# Allegro board AI_NAS_DB__A2_PCB.brd
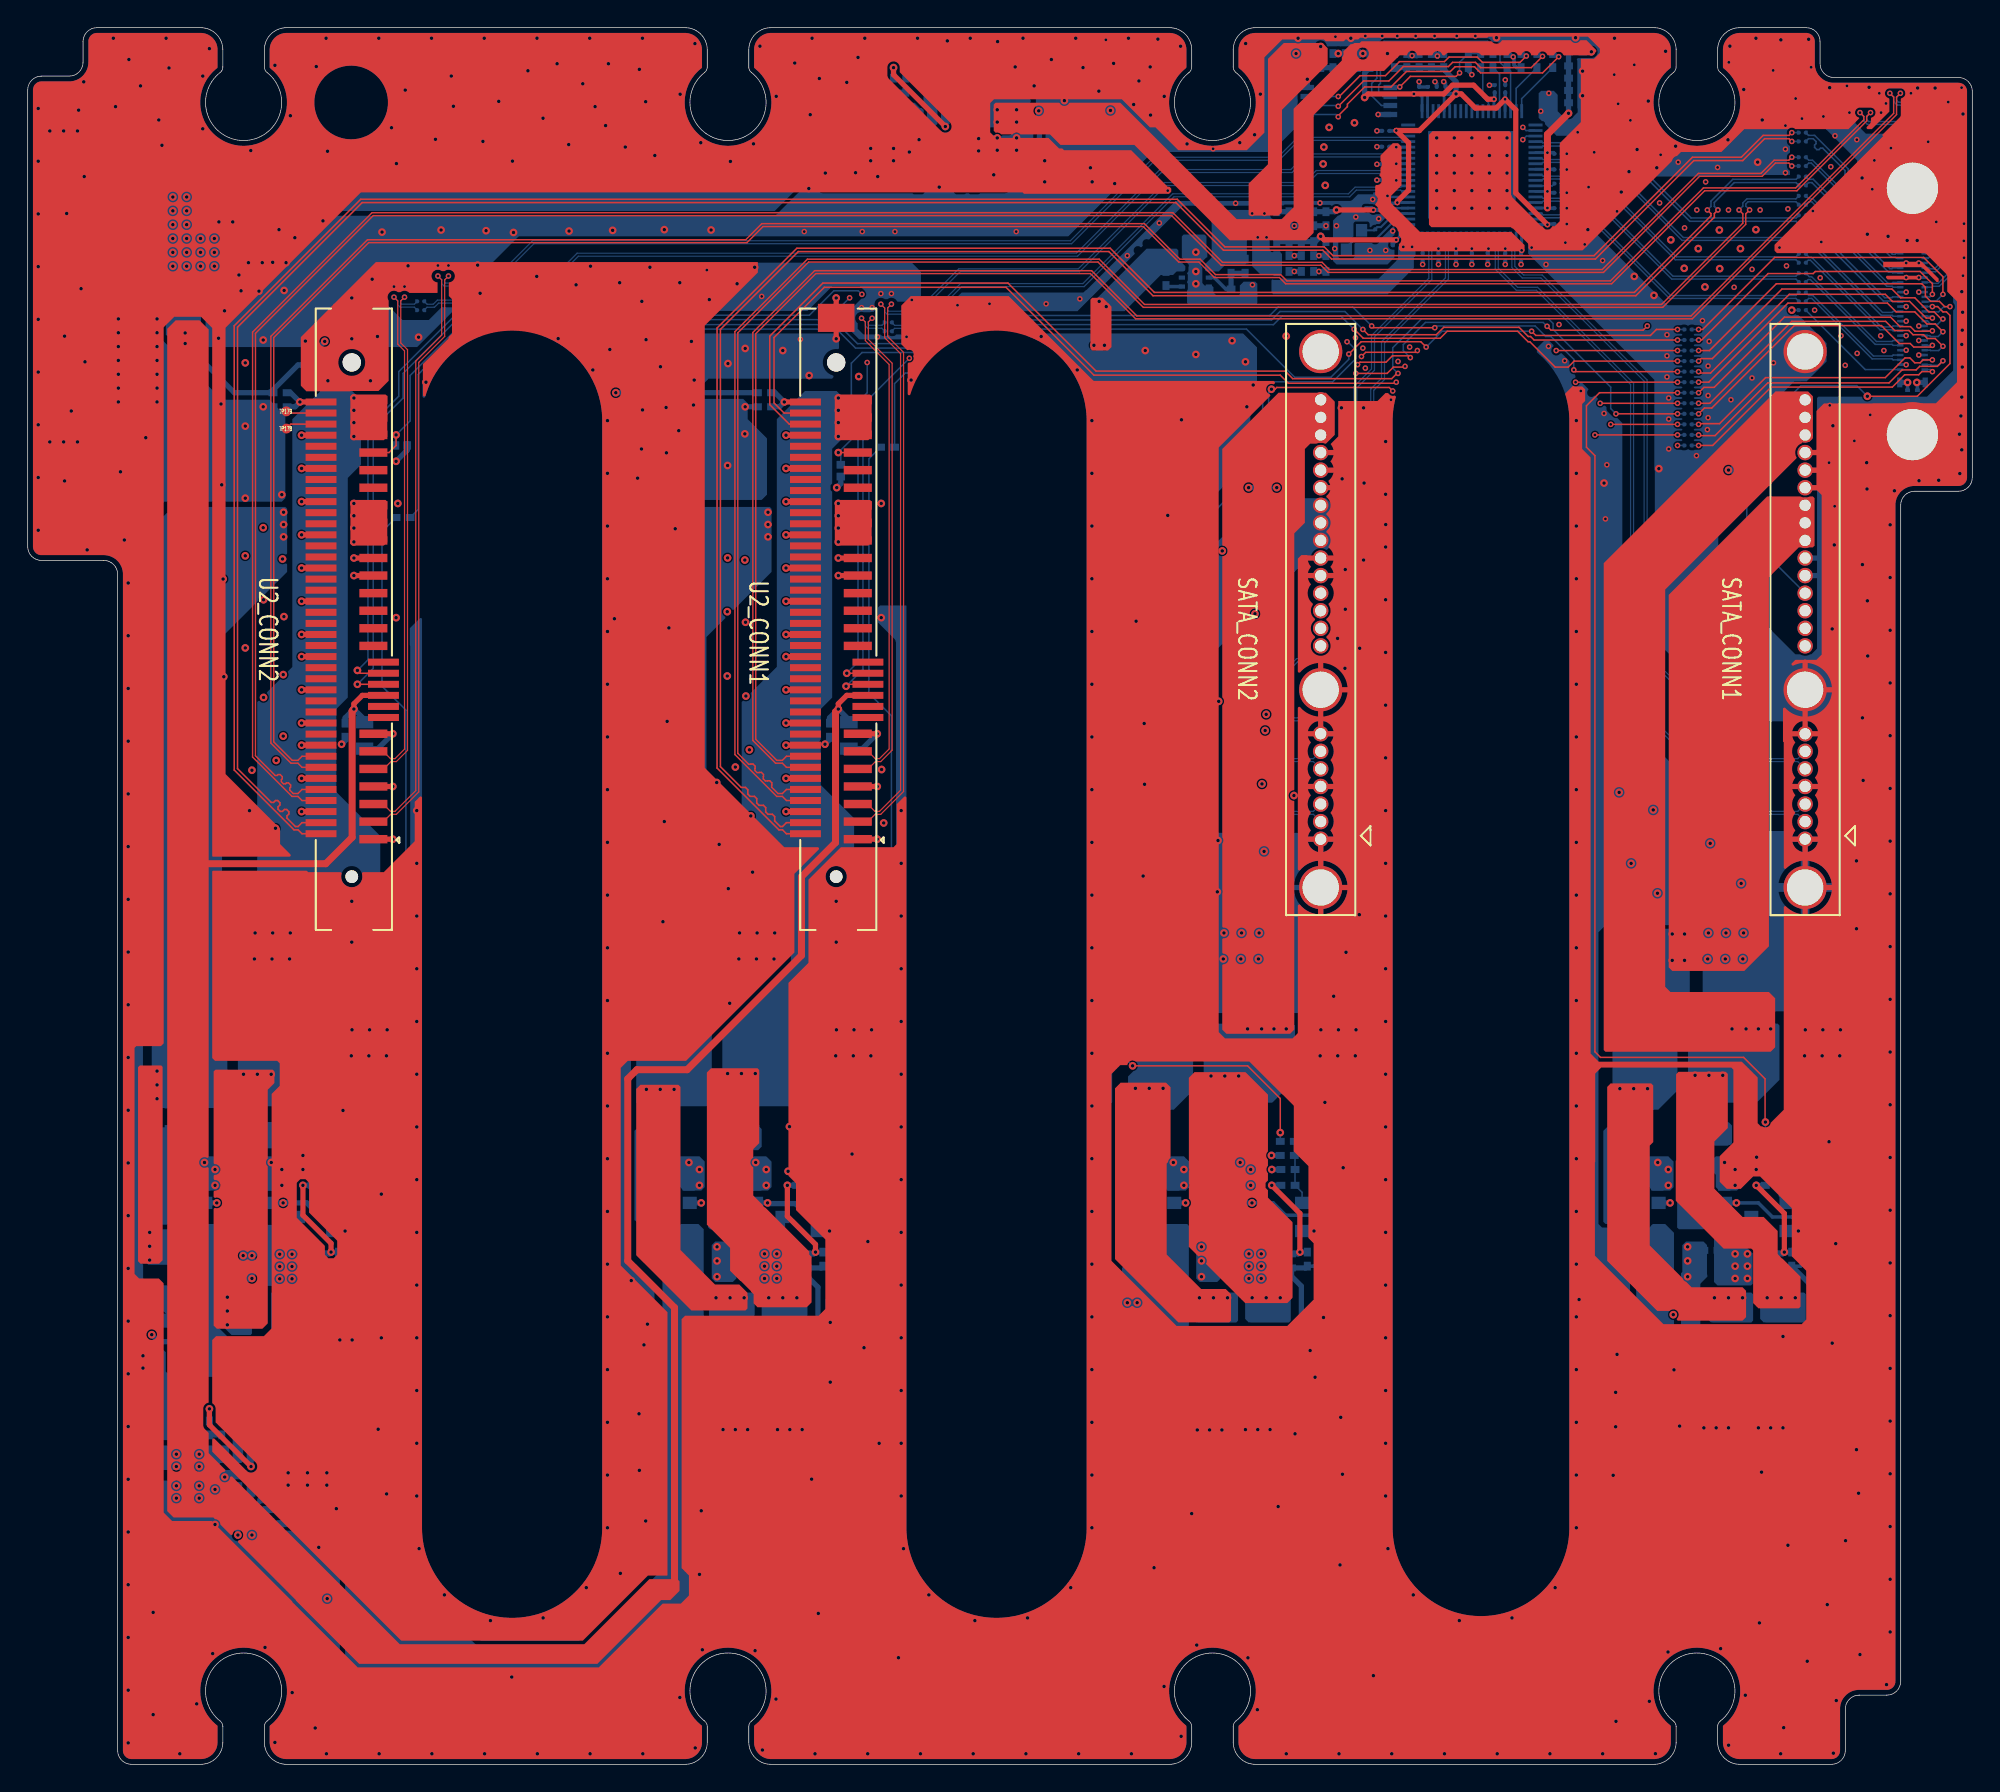
[diagram p0: board, top side]
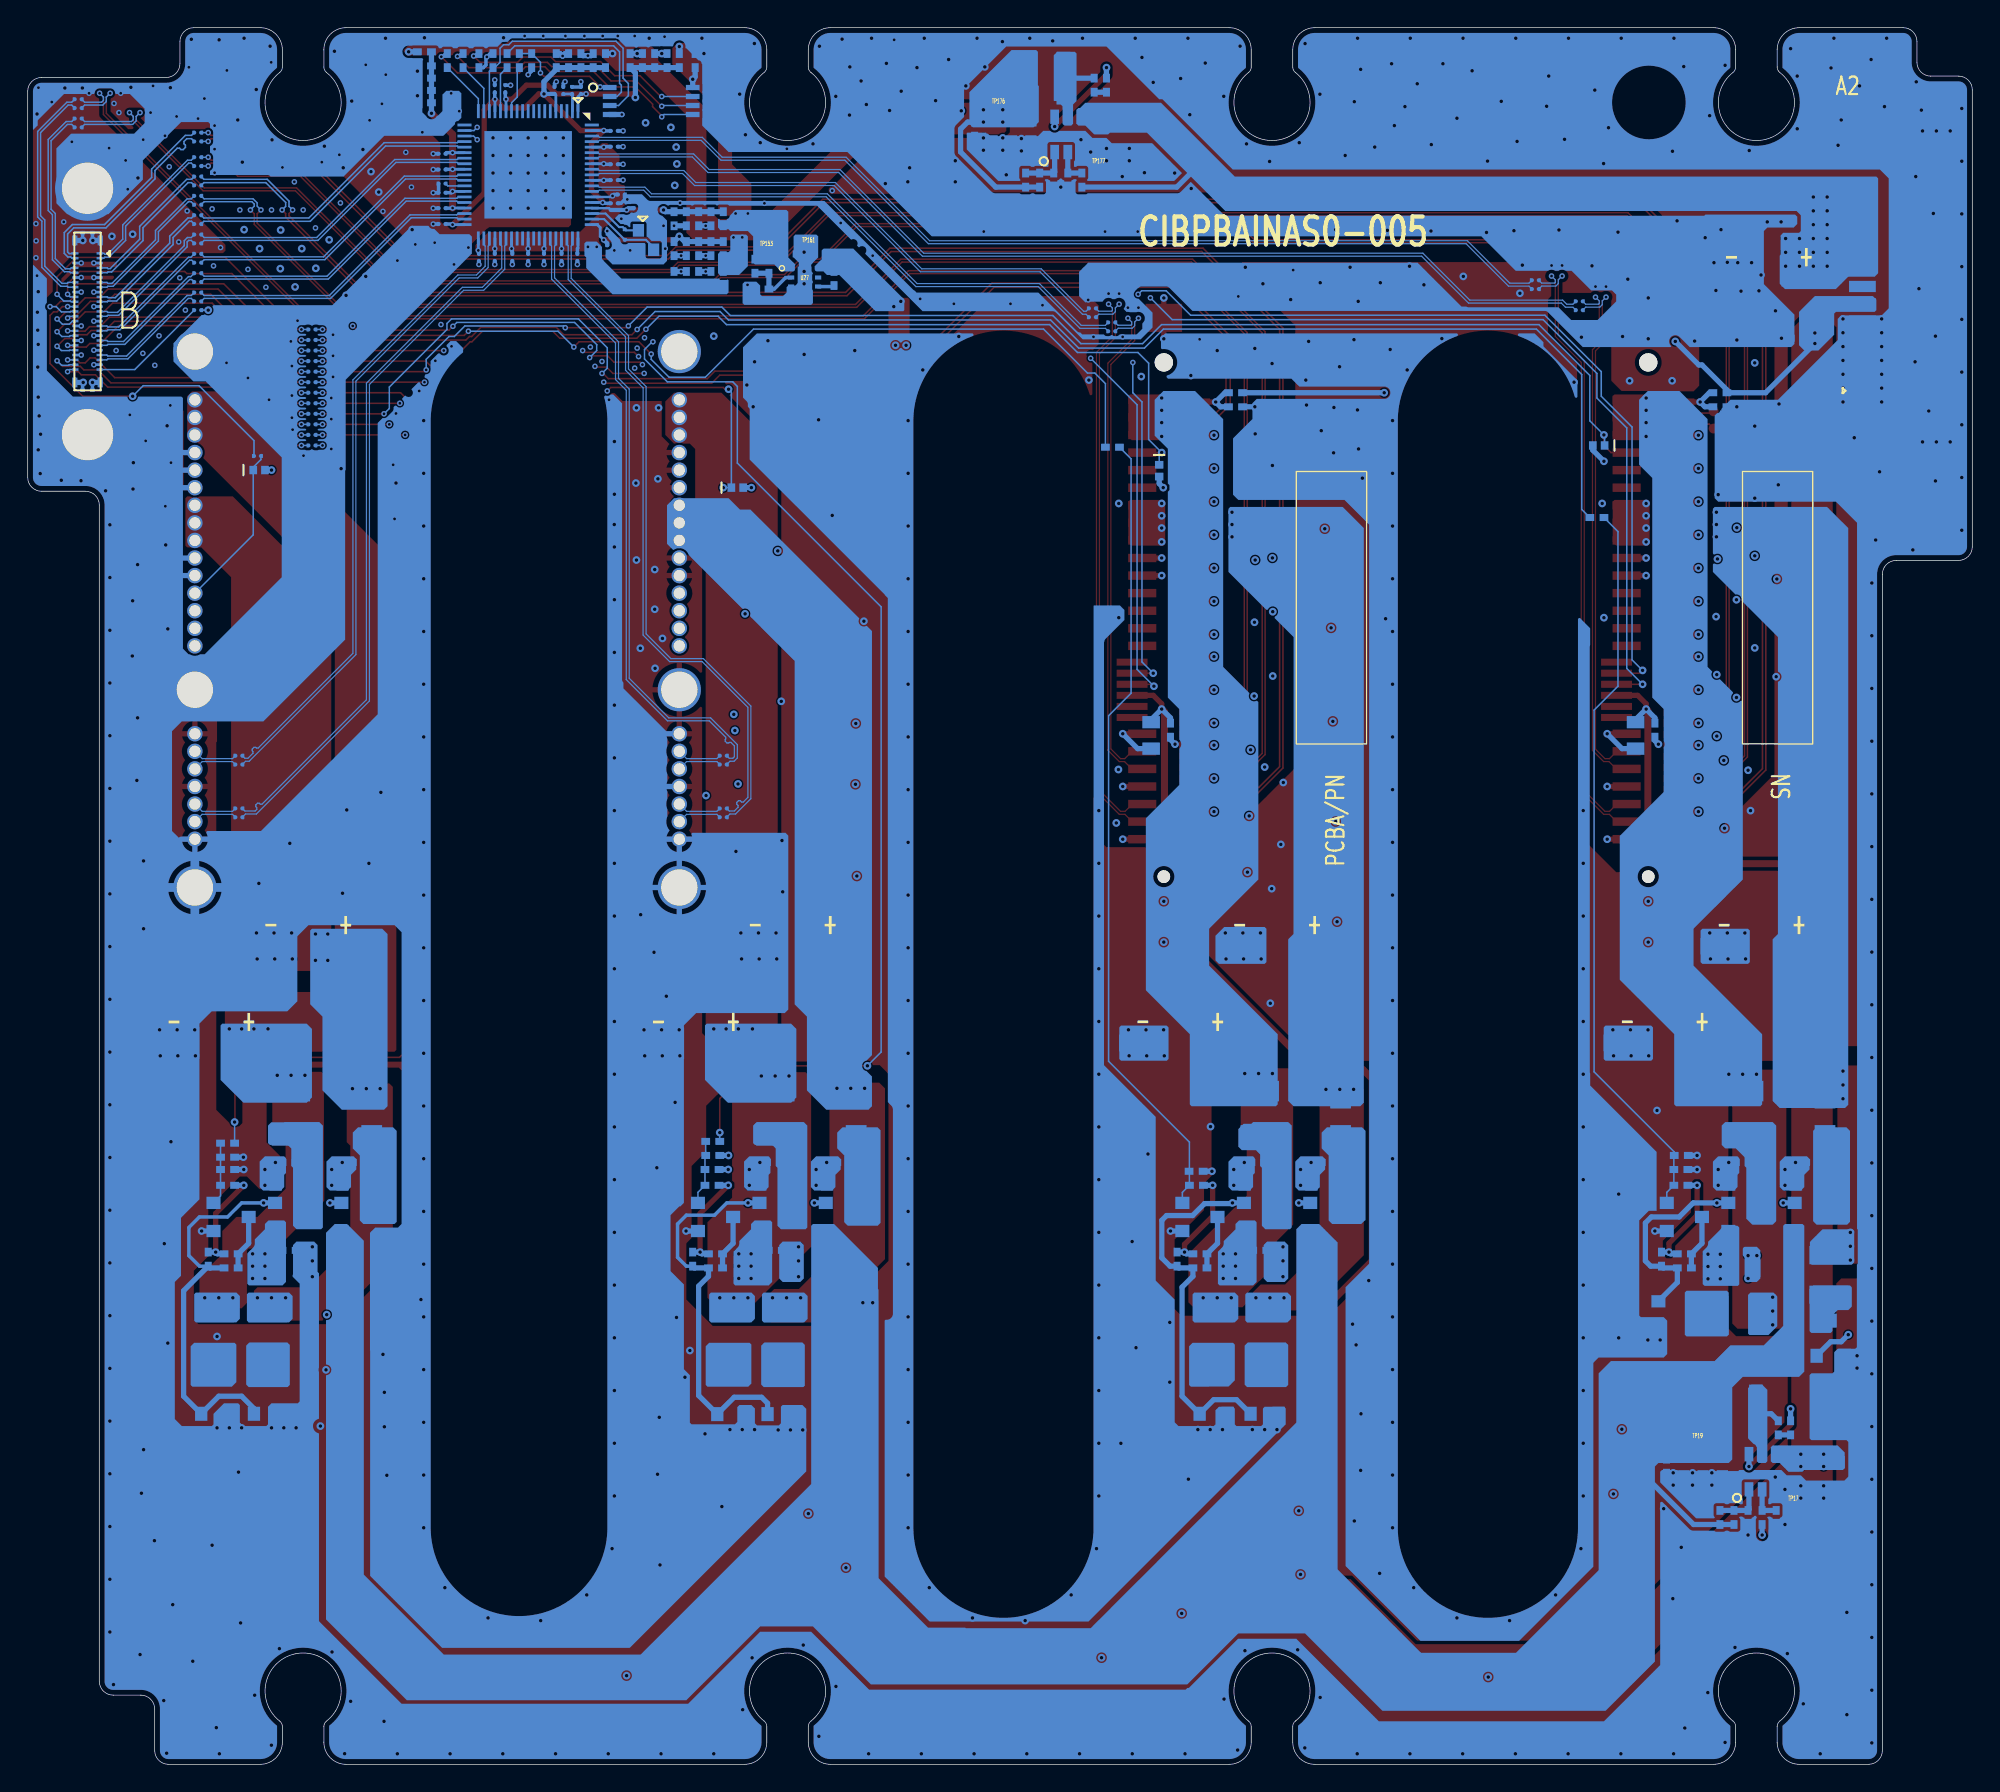
[diagram p1: board, bottom side, seen from below]

Outline 140.5 x 125.5 mm; copper layers: TOP, GND02, PWR03, BOTTOM. Coordinates in mm from the lower left corner of the outline.
Outline path: 0,121 arc(0.29,121.71) 1,122 3,122 arc(3.71,122.29) 4,123 4,124.5 arc(4.29,125.21) 5,125.5 12.5,125.5 arc(13.63,125.03) 14.1,123.9 14.1,122.66 arc(14.05,122.44) 13.91,122.26 arc(15.6,117.34) 17.29,122.26 arc(17.15,122.44) 17.1,122.66 17.1,123.9 arc(17.57,125.03) 18.7,125.5 47.5,125.5 arc(48.63,125.03) 49.1,123.9 49.1,122.66 arc(49.05,122.44) 48.91,122.26 arc(50.6,117.34) 52.29,122.26 arc(52.15,122.44) 52.1,122.66 52.1,123.9 arc(52.57,125.03) 53.7,125.5 82.5,125.5 arc(83.63,125.03) 84.1,123.9 84.1,122.66 arc(84.05,122.44) 83.91,122.26 arc(85.6,117.34) 87.29,122.26 arc(87.15,122.44) 87.1,122.66 87.1,123.9 arc(87.57,125.03) 88.7,125.5 117.5,125.5 arc(118.63,125.03) 119.1,123.9 119.1,122.66 arc(119.05,122.44) 118.91,122.26 arc(120.6,117.34) 122.29,122.26 arc(122.15,122.44) 122.1,122.66 122.1,123.9 arc(122.57,125.03) 123.7,125.5 128.5,125.5 arc(129.21,125.21) 129.5,124.5 129.5,122.9 arc(129.79,122.19) 130.5,121.9 139.5,121.9 arc(140.21,121.61) 140.5,120.9 140.5,93 arc(140.21,92.29) 139.5,92 136.33,92 arc(135.62,91.71) 135.33,91 135.33,6 arc(135.03,5.29) 134.33,5 132.33,5 arc(131.62,4.71) 131.33,4 131.33,1 arc(131.03,0.29) 130.33,0 123.7,0 arc(122.57,0.47) 122.1,1.6 122.1,2.73 arc(122.15,2.95) 122.29,3.13 arc(120.6,8.05) 118.91,3.13 arc(119.05,2.95) 119.1,2.73 119.1,1.6 arc(118.63,0.47) 117.5,0 88.7,0 arc(87.57,0.47) 87.1,1.6 87.1,2.73 arc(87.15,2.95) 87.29,3.13 arc(85.6,8.05) 83.91,3.13 arc(84.05,2.95) 84.1,2.73 84.1,1.6 arc(83.63,0.47) 82.5,0 53.7,0 arc(52.57,0.47) 52.1,1.6 52.1,2.73 arc(52.15,2.95) 52.29,3.13 arc(50.6,8.05) 48.91,3.13 arc(49.05,2.95) 49.1,2.73 49.1,1.6 arc(48.63,0.47) 47.5,0 18.7,0 arc(17.57,0.47) 17.1,1.6 17.1,2.73 arc(17.15,2.95) 17.29,3.13 arc(15.6,8.05) 13.91,3.13 arc(14.05,2.95) 14.1,2.73 14.1,1.6 arc(13.63,0.47) 12.5,0 7.5,0 arc(6.79,0.29) 6.5,1 6.5,86 arc(6.21,86.71) 5.5,87 1,87 arc(0.29,87.29) 0,88 0,121

## Design rules (mm)
constraint set DEFAULT: min track width 0.112
net group DPE_CLKN1: nets DPE_CLKN1 N32455776
net group DPE_CLKN2: nets DPE_CLKN2 N32589847
net group DPE_CLKN3: nets DPE_CLKN3 N32664505
net group DPE_CLKP1: nets DPE_CLKP1 N32455769
net group DPE_CLKP2: nets DPE_CLKP2 N32589789
net group DPE_CLKP3: nets DPE_CLKP3 N32664525
net group DPE_RXN2: nets DPE_RXN2 N32455880
net group DPE_RXN3: nets DPE_RXN3 N32590057
net group DPE_RXN8: nets DPE_RXN8 N32665204
net group DPE_RXN9: nets DPE_RXN9 N32665409
net group DPE_RXP2: nets DPE_RXP2 N32455887
net group DPE_RXP3: nets DPE_RXP3 N32590086
net group DPE_RXP8: nets DPE_RXP8 N32665224
net group DPE_RXP9: nets DPE_RXP9 N32665457
net group DPE_TXN2: nets DPE_TXN2 N32455855
net group DPE_TXN3: nets DPE_TXN3 N32590006
net group DPE_TXN8: nets DPE_TXN8 N32665094
net group DPE_TXN9: nets DPE_TXN9 N32665319
net group DPE_TXP2: nets DPE_TXP2 N32455848
net group DPE_TXP3: nets DPE_TXP3 N32589961
net group DPE_TXP8: nets DPE_TXP8 N32665139
net group DPE_TXP9: nets DPE_TXP9 N32665364
net group OFF_CTRL1: nets N32731773 OFF_CTRL1
net group OFF_CTRL2: nets N32732099 OFF_CTRL2
net group SATA1_RXM: nets N32547936 SATA1_RXM
net group SATA1_RXP: nets N32547940 SATA1_RXP
net group SATA1_TXM: nets N32547896 SATA1_TXM
net group SATA1_TXP: nets N32547892 SATA1_TXP
net group SATA2_RXM: nets N32548181 SATA2_RXM
net group SATA2_RXP: nets N32548185 SATA2_RXP
net group SATA2_TXM: nets N32548141 SATA2_TXM
net group SATA2_TXP: nets N32548137 SATA2_TXP
net group SATA3_RXM: nets N32444973 SATA3_RXM
net group SATA3_RXP: nets N32693265 SATA3_RXP
net group SATA3_TXM: nets N32444933 SATA3_TXM
net group SATA3_TXP: nets N32444929 SATA3_TXP
net group SATA4_RXM: nets N32590084 SATA4_RXM
net group SATA4_RXP: nets N32693602 SATA4_RXP
net group SATA4_TXM: nets N32590026 SATA4_TXM
net group SATA4_TXP: nets N32590004 SATA4_TXP
net group VCCO33: nets N32595209 VCCO33
net group POWER: nets GND

## Placement (name value [footprint] x y rotation side)
C3  0.22uF  [C0201]  128.22 109.15 0 bottom
C4  0.22uF  [C0201]  128.22 108.52 0 bottom
C7  0.22uF  [C0201]  128.22 105.72 0 bottom
C8  0.22uF  [C0201]  128.22 106.36 0 bottom
C17  270uF  [CAP-SMD-D6_3]  14.7 107.39 0 bottom
C18  0.1uF  [C0402]  12.52 111.57 0 bottom
C19  0.1uF  [C0402]  12.65 103.06 0 bottom
C20  12pF  [C0201]  97.36 111.18 90 bottom
C21  12pF  [C0201]  97.36 109.91 270 bottom
C22  1uF  [C0201]  101.17 120.96 90 bottom
C23  10nF  [C0201]  125.24 69.08 180 bottom
C24  10nF  [C0201]  125.24 72.25 180 bottom
C25  0.1uF  [C0402]  121.61 37.14 180 bottom
C26  1uF  [C0402]  127.45 36.51 270 bottom
C27  0.1uF  [C0402]  121.61 43.49 0 bottom
C28  10nF  [C0201]  125.24 68.44 180 bottom
C29  10nF  [C0201]  125.24 72.89 180 bottom
C30  22uF  [C0805]  121.61 35.87 180 bottom
C31  22uF  [C0805]  121.61 42.1 0 bottom
C32  22uF  [C0805]  116.79 42.1 180 bottom
C33  0.1uF  [C0402]  116.53 43.49 180 bottom
C34  220uF  [CAP-SMD-D6_3]  120.23 59.13 0 bottom
C35  270uF  [CAP-SMD-D6_3]  127.23 52.13 0 bottom
C36  22uF  [C0805]  86.49 35.87 180 bottom
C37  1uF  [C0402]  92.45 36.51 270 bottom
C38  10nF  [C0201]  90.24 69.08 180 bottom
C39  0.1uF  [C0402]  86.49 37.14 180 bottom
C40  22uF  [C0805]  86.61 42.1 0 bottom
C41  10nF  [C0201]  90.24 68.44 180 bottom
C42  0.1uF  [C0402]  86.61 43.49 0 bottom
C43  10nF  [C0201]  90.24 72.25 180 bottom
C44  10nF  [C0201]  90.24 72.89 180 bottom
C45  22uF  [C0805]  81.79 42.1 180 bottom
C46  0.1uF  [C0402]  81.53 43.49 180 bottom
C47  220uF  [CAP-SMD-D6_3]  85.22 59.13 0 bottom
C48  270uF  [CAP-SMD-D6_3]  92.22 52.13 0 bottom
C49  22uF  [C0805]  16.71 35.85 180 bottom
C50  0.1uF  [C0402]  16.71 37.12 180 bottom
C51  1uF  [C0402]  22.45 36.51 270 bottom
C52  22uF  [C0805]  16.61 42.1 0 bottom
C53  0.1uF  [C0402]  16.61 43.49 0 bottom
C54  0.22uF  [C0201]  128.22 116.14 0 bottom
C55  10nF  [C0201]  31.57 107.25 0 bottom
C56  10nF  [C0201]  31.57 106.61 0 bottom
C57  10nF  [C0201]  28.39 105.09 0 bottom
C58  22uF  [C0805]  11.79 42.1 180 bottom
C59  0.1uF  [C0402]  11.53 43.49 180 bottom
C60  0.22uF  [C0201]  128.22 115.5 0 bottom
C61  10nF  [C0201]  28.39 105.72 0 bottom
C62  22uF  [C0805]  24.33 74.35 270 bottom
C63  0.1uF  [C0402]  22.93 74.74 270 bottom
C64  220uF  [CAP-SMD-D6_3]  15.23 59.13 0 bottom
C65  270uF  [CAP-SMD-D6_3]  22.23 52.13 0 bottom
C66  0.1uF  [C0402]  51.49 37.14 180 bottom
C67  22uF  [C0805]  51.61 42.1 0 bottom
C68  0.1uF  [C0402]  51.61 43.49 0 bottom
C69  10nF  [C0201]  63.57 105.22 0 bottom
C70  10nF  [C0201]  63.57 104.58 0 bottom
C71  22uF  [C0805]  51.49 35.87 180 bottom
C72  1uF  [C0402]  57.45 36.51 270 bottom
C73  0.22uF  [C0201]  128.22 113.34 0 bottom
C74  0.22uF  [C0201]  128.22 112.71 0 bottom
C75  10nF  [C0201]  62.18 104.2 0 bottom
C76  10nF  [C0201]  62.18 103.56 0 bottom
C77  22uF  [C0805]  46.79 42.1 180 bottom
C78  0.1uF  [C0402]  46.53 43.49 180 bottom
C79  22uF  [C0805]  59.33 74.35 270 bottom
C80  0.1uF  [C0402]  57.93 74.74 270 bottom
C81  220uF  [CAP-SMD-D6_3]  50.22 59.13 0 bottom
C82  270uF  [CAP-SMD-D6_3]  57.22 52.13 0 bottom
C1577  4.7uF  [C0402]  83.26 109.15 0 bottom
C1578  4.7uF  [C0402]  85.42 109.15 180 bottom
C1579  1nF  [C0402]  87.96 108.26 90 bottom
C1676  0.1uF  [C0402]  92.28 123.12 90 bottom
C2125  22uF  [C0805]  60.02 117.53 270 bottom
C2126  22uF  [C0805]  61.67 117.53 270 bottom
C2127  0.1uF  [C0402]  63.07 117.66 270 bottom
C2128  0.1uF  [C0402]  63.45 121.34 270 bottom
C2129  220pF  [C0402]  68.4 114.49 270 bottom
C2130  22uF  [C0603]  68.02 118.04 270 bottom
C2131  22uF  [C0603]  70.81 118.04 270 bottom
C2132  22uF  [C0603]  69.42 118.04 270 bottom
C2133  0.1uF  [C0402]  72.08 118.17 270 bottom
C2134  0.1uF  [C0201]  98.12 118.04 180 bottom
C2135  0.1uF  [C0201]  106.75 121.09 90 bottom
C2136  0.1uF  [C0201]  110.56 111.31 0 bottom
C2137  0.1uF  [C0201]  98.12 112.81 180 bottom
C2138  0.1uF  [C0201]  102.44 120.96 90 bottom
C2139  0.1uF  [C0201]  110.56 112.45 0 bottom
C2140  0.1uF  [C0201]  110.56 115.25 0 bottom
C2141  0.1uF  [C0201]  110.56 116.39 0 bottom
C2142  0.1uF  [C0201]  110.56 113.57 0 bottom
C2143  0.1uF  [C0201]  100.53 120.96 90 bottom
C2144  0.1uF  [C0201]  105.99 121.09 90 bottom
C2145  0.1uF  [C0201]  96.72 112.2 270 bottom
C2146  0.1uF  [C0201]  97.61 113.44 180 bottom
C2147  0.1uF  [C0201]  107.9 108.9 270 bottom
C2148  0.1uF  [C0201]  106.75 108.9 270 bottom
C2149  0.1uF  [C0201]  104.34 108.9 270 bottom
C2150  0.1uF  [C0201]  105.48 108.9 270 bottom
C2151  0.1uF  [C0201]  103.2 108.9 270 bottom
C2152  0.1uF  [C0201]  101.93 108.9 270 bottom
C2153  0.1uF  [C0201]  98.12 115.63 180 bottom
C2154  0.1uF  [C0201]  98.12 114.49 180 bottom
C2155  0.1uF  [C0201]  98.12 116.9 180 bottom
C2156  0.1uF  [C0201]  98.37 109.79 180 bottom
C2157  220pF  [C0402]  18.23 17.84 270 bottom
C2158  22uF  [C0805]  9.85 20.89 270 bottom
C2159  22uF  [C0805]  11.5 20.89 270 bottom
C2160  0.1uF  [C0402]  12.9 21.01 270 bottom
C2161  0.1uF  [C0402]  14.02 24.32 270 bottom
C2163  22uF  [C0603]  20.85 21.57 270 bottom
C2164  22uF  [C0603]  19.45 21.57 270 bottom
C2165  22uF  [C0603]  18.06 21.57 270 bottom
C2166  0.1uF  [C0402]  22.1 21.55 270 bottom
C2171  10nF  [C0402]  99.64 123.12 90 bottom
C2172  1nF  [C0402]  101.42 123.12 90 bottom
C2173  100pF  [C0402]  100.53 123.12 90 bottom
C2174  10pF  [C0402]  102.31 123.12 90 bottom
C2175  10nF  [C0402]  111.83 122.74 0 bottom
C2176  1nF  [C0402]  111.83 120.96 0 bottom
C2177  100pF  [C0402]  111.83 121.85 0 bottom
C2178  10pF  [C0402]  111.83 120.07 0 bottom
C2179  10nF  [C0402]  91.13 107.37 90 bottom
C2180  1nF  [C0402]  92.91 107.37 90 bottom
C2181  100pF  [C0402]  92.02 107.37 90 bottom
C2182  10pF  [C0402]  93.8 107.37 90 bottom
C2183  10nF  [C0402]  91.13 109.53 270 bottom
C2184  1nF  [C0402]  92.91 109.53 270 bottom
C2185  100pF  [C0402]  92.02 109.53 270 bottom
C2186  10pF  [C0402]  93.8 109.53 270 bottom
C2187  10nF  [C0402]  94.31 123.12 90 bottom
C2188  1nF  [C0402]  96.09 123.12 90 bottom
C2189  100pF  [C0402]  95.2 123.12 90 bottom
C2190  10pF  [C0402]  96.97 123.12 90 bottom
C2191  10nF  [C0402]  91.13 111.69 270 bottom
C2192  1nF  [C0402]  92.91 111.69 270 bottom
C2193  100pF  [C0402]  92.02 111.69 270 bottom
C2194  10pF  [C0402]  93.8 111.69 270 bottom
C2195  0.1uF  [C0402]  126.06 43.87 180 bottom
C2196  0.1uF  [C0402]  91.01 44 180 bottom
C2197  0.1uF  [C0402]  21.03 44 180 bottom
C2198  0.1uF  [C0402]  56.08 42.86 180 bottom
D1  ESD5451N  [DFN1006-2]  123.77 93.53 180 bottom
D2  ESD5451N  [DFN1006-2]  89.23 92.26 180 bottom
D4  ESD5451N  [DFN1006-2]  27 95.31 0 bottom
D6  ESD5451N  [DFN1006-2]  58.75 93.48 270 bottom
F1  BSMD0805-125-6V  [F0805]  115.64 46.8 90 bottom
F2  BSMD1210-200-16V  [F1210]  121.49 47.05 90 bottom
F3  BSMD0805-125-6V  [F0805]  80.64 46.8 90 bottom
F4  BSMD1210-200-16V  [F1210]  86.49 47.05 90 bottom
F5  BSMD0805-125-6V  [F0805]  10.64 46.8 90 bottom
F6  BSMD1210-200-16V  [F1210]  16.49 47.05 90 bottom
F7  BSMD0805-125-6V  [F0805]  45.64 46.8 90 bottom
F8  BSMD1210-200-16V  [F1210]  51.49 47.05 90 bottom
FB1  120R@100MHz  [R0402]  98.75 123.12 270 bottom
FB2  120R@100MHz  [R0402]  111.83 123.76 180 bottom
FB3  120R@100MHz  [R0402]  90.24 107.37 270 bottom
FB4  120R@100MHz  [R0402]  90.24 109.53 90 bottom
FB5  120R@100MHz  [R0402]  93.42 123.12 270 bottom
FB6  120R@100MHz  [R0402]  90.24 111.69 90 bottom
H1  LLZN-NUT-0200  [HOLE_C3R00_C5R00]  136.17 113.9 180 bottom
H2  LLZN-NUT-0200  [HOLE_C3R00_C5R00]  136.17 96.1 180 bottom
J1  OK-118RF050/2-35  [CON50-0P35-OK-118RF]  136.07 105.03 270 bottom
J2  WF13-131G1R  [CON13-1P25-21P4X6P7]  7.95 105.34 90 bottom
J3  LYDSA-L5ZLC985M-221N  [SATA30_22P_V_DIP]  128.42 98.61 270 top
J4  LYDSA-L5ZLC985M-221N  [SATA30_22P_V_DIP]  93.42 98.61 270 top
J5  LYDSF-8639430-683N  [SSF-8639-4030683N]  24.98 82.73 270 top
J6  LYDSF-8639430-683N  [SSF-8639-4030683N]  59.97 82.73 270 top
L5  3.3uH  [L414120]  16.84 25.54 0 bottom
L36  1.5uH  [L414120]  66.88 121.85 0 bottom
NOREF  -  []  -72.75 -61.59 0 top
NOREF#2  -  []  7.5 0 90 top
NOREF#3  -  []  35.13 36.25 0 top
NOREF#4  -  []  63.89 217.33 0 top
NOREF#5  -  []  104.85 45.91 0 top
NOREF#6  -  []  235.07 103.77 0 top
NOREF#7  -  []  70.18 41.59 0 top
NOREF#8  -  []  0 121 0 top
NOREF#9  -  []  23.72 119.77 0 top
NOREF#10  -  []  220.6 183.4 0 top
NOREF#11  -  []  64.08 164.97 0 top
Q1  CJ3401  [SOT23]  121.36 39.56 90 bottom
Q3  MMBT3904  [SOT23]  125.8 39.56 90 bottom
Q4  CJ3401  [SOT23]  116.57 39.56 90 bottom
Q5  CJ3401  [SOT23]  86.36 39.56 90 bottom
Q7  MMBT3904  [SOT23]  90.8 39.56 90 bottom
Q8  CJ3401  [SOT23]  81.57 39.56 90 bottom
Q11  CJ3401  [SOT23]  16.36 39.56 90 bottom
Q12  MMBT3904  [SOT23]  20.8 39.56 90 bottom
Q13  CJ3401  [SOT23]  11.57 39.56 90 bottom
Q17  CJ3401  [SOT23]  51.36 39.56 90 bottom
Q19  MMBT3904  [SOT23]  55.8 39.56 90 bottom
Q20  CJ3401  [SOT23]  46.57 39.56 90 bottom
Q21  CJ2310  [SOT-23]  127.96 25.33 0 bottom
Q22  CJ2310  [SOT-23]  124.15 25.33 0 bottom
Q23  CJ2310  [SOT-23]  90.68 25.31 0 bottom
Q24  CJ2310  [SOT-23]  87.04 25.31 0 bottom
Q25  CJ2310  [SOT-23]  22.68 33.46 90 bottom
Q26  CJ2310  [SOT-23]  11.25 29.52 0 bottom
Q27  CJ2310  [SOT-23]  55.83 25.33 0 bottom
Q28  CJ2310  [SOT-23]  52.14 25.33 0 bottom
R1  0R  [R0201]  128.22 111.31 180 bottom
R2  0R  [R0201]  128.22 111.95 180 bottom
R3  0R  [R0201]  119.96 99.12 0 bottom
R4  0R  [R0201]  119.96 99.88 0 bottom
R5  0R  [R0201]  119.96 97.6 0 bottom
R6  0R  [R0201]  119.96 98.36 0 bottom
R7  0R  [R0201]  119.96 102.93 0 bottom
R8  0R  [R0201]  119.96 103.69 0 bottom
R9  0R  [R0201]  123.9 94.55 0 bottom
R10  0R  [R0201]  119.96 96.83 0 bottom
R11  0R  [R0201]  119.96 102.17 0 bottom
R12  0R  [R0201]  119.96 96.07 0 bottom
R13  0R  [R0201]  119.96 100.64 0 bottom
R14  0R  [R0201]  119.96 95.31 0 bottom
R15  0R  [R0201]  119.96 101.41 0 bottom
R16  0R  [R0201]  128.22 105.09 180 bottom
R17  0R  [R0201]  128.22 117.92 0 bottom
R19  0R  [R0201]  128.22 117.28 0 bottom
R21  12K  [R0201]  100.78 108.9 270 bottom
R22  12K  [R0201]  110.56 114.23 0 bottom
R23  4.7K  [R0201]  101.8 120.96 270 bottom
R24  100K  [R0402]  126.06 41.84 0 bottom
R25  100K  [R0402]  125.8 36.89 180 bottom
R26  820K  [R0402]  125.8 35.87 0 bottom
R29  100K  [R0402]  126.06 42.99 0 bottom
R30  100K  [R0402]  91.06 41.84 0 bottom
R31  820K  [R0402]  90.8 35.87 0 bottom
R32  100K  [R0402]  90.8 36.89 180 bottom
R35  100K  [R0402]  91.06 42.99 0 bottom
R40  100K  [R0402]  21.06 41.84 0 bottom
R41  100K  [R0402]  20.8 36.89 180 bottom
R42  820K  [R0402]  20.8 35.87 0 bottom
R43  100K  [R0402]  21.06 42.99 0 bottom
R44  1K  [R0402]  27.12 90.1 180 bottom
R49  4.7K  [R0402]  18.23 99.12 180 bottom
R50  0R  [R0402]  18.23 98.1 180 bottom
R51  100K  [R0402]  56.06 41.84 0 bottom
R52  100K  [R0402]  55.8 36.89 180 bottom
R53  820K  [R0402]  55.8 35.87 0 bottom
R55  1K  [R0402]  62.12 95.18 180 bottom
R57  4.7K  [R0402]  53.23 99.12 180 bottom
R58  0R  [R0402]  53.23 98.1 180 bottom
R68  1K  [R0402]  91.01 45.02 0 bottom
R69  1K  [R0402]  126.06 44.89 0 bottom
R83  13.3K  [R0402]  16.2 17.84 270 bottom
R87  100K  [R0402]  17.22 17.84 270 bottom
R201  20K  [R0402]  87.45 106.61 0 bottom
R2385  100K  [R0402]  82.24 107.37 270 bottom
R2386  100K  [R0402]  86.94 108.26 90 bottom
R2468  10K  [R0402]  107.9 123.12 90 bottom
R2469  10K  [R0402]  106.88 123.12 270 bottom
R2470  10K  [R0402]  104.09 123.12 90 bottom
R2471  0R  [R0402]  104.98 123.12 270 bottom
R2473  0R  [R0402]  109.04 123.12 270 bottom
R2476  0R  [R0402]  105.86 123.12 270 bottom
R2593  0R  [R0402]  13.13 24.32 270 bottom
R2692  0R  [R0402]  110.18 123.12 270 bottom
R2859  100K  [R0402]  64.34 114.49 90 bottom
R2860  100K  [R0402]  67.38 114.49 270 bottom
R2861  0R  [R0402]  62.56 121.34 270 bottom
R2862  20K  [R0402]  65.35 114.49 270 bottom
R2863  91K  [R0402]  66.37 114.49 270 bottom
R2925  100K  [R0402]  15.19 17.84 90 bottom
R2926  100K  [R0402]  14.17 17.84 270 bottom
R2929  0R  [R0201]  128.22 114.74 0 bottom
R2930  0R  [R0201]  128.22 114.11 0 bottom
R2931  0R  [R0201]  136.85 118.3 0 bottom
R2932  0R  [R0201]  136.85 118.93 0 bottom
R2933  0R  [R0201]  136.85 119.69 0 bottom
R2934  0R  [R0201]  136.85 120.33 0 bottom
R2935  0R  [R0201]  128.22 110.55 180 bottom
R2936  0R  [R0201]  128.22 109.91 180 bottom
R2937  0R  [R0201]  128.22 107.76 180 bottom
R2938  0R  [R0201]  128.22 107.12 180 bottom
R2940  300R  [R1210]  126.95 31.17 270 bottom
R2941  300R  [R1210]  123.14 31.17 270 bottom
R2942  300R  [R1210]  89.74 31.17 270 bottom
R2943  300R  [R1210]  85.93 31.17 270 bottom
R2944  300R  [R1210]  16.84 32.44 0 bottom
R2945  300R  [R1210]  10.36 35.37 270 bottom
R2946  300R  [R1210]  54.81 31.17 270 bottom
R2947  300R  [R1210]  51 31.17 270 bottom
TP17  TP_0p7mm  [TP_0_7MM]  12.9 19.24 180 bottom
TP19  TP_0p7mm  [TP_0_7MM]  19.81 23.76 0 bottom
TP153  TP_0p7mm  [TP_0_7MM]  87.07 109.91 180 bottom
TP161  TP_0p7mm  [TP_0_7MM]  84.02 110.17 180 bottom
TP176  TP_0p7mm  [TP_0_7MM]  70.3 120.2 0 bottom
TP177  TP_0p7mm  [TP_0_7MM]  63.07 115.88 180 bottom
TP178  TP_0p7mm  [TP_0_7MM]  18.69 96.53 0 top
TP179  TP_0p7mm  [TP_0_7MM]  18.69 97.77 0 top
U1  JMB585  [QFN76-0P4-9X9]  104.34 114.87 270 bottom
U8  SY8156IADC  [TSOT23-6]  15.19 21.14 180 bottom
U27  TLV75901PDRVR  [WSON6-0P65-2X2]  84.37 107.44 180 bottom
U75  P25Q40SH-TSH-IR  [TSSOP8-0P65-3X6P4]  95.45 120.2 270 bottom
U98  SY8156IADC  [TSOT23-6]  65.35 117.79 180 bottom
Y1  25MHz  [SMD2016-4P]  95.83 110.17 270 bottom

## Library data of the parts
C3 C4 C7 C8 C54 C60 C73 C74 = General_CAP: signal model: GENERAL_CAP_C0201_0.22UF_0.22uF
C17 C34 C35 C48 C64 C65 C81 C82 = General_CAP_POL
C18 C19 C25-C27 C33 C37 C39 C42 C46 C50 C51 C53 C59 C63 C66 C68 C72 C78 C80 C1577-C1579 C1676 C2127-C2129 C2133 C2157 C2160 C2161 C2166 C2171-C2198 = General_CAP: Tolerance: #TOL; User Part Number: HAMP
C20-C22 C30-C32 C36 C40 C45 C49 C52 C58 C62 C67 C71 C77 C79 C2125 C2126 C2134-C2156 C2158 C2159 = General_CAP
C23 C24 C28 C29 C38 C41 C43 C55-C57 C61 C69 C70 C75 C76 = General_CAP: signal model: GENERAL_CAP_C0201_10NF_10nF
C44 = General_CAP: signal model: CAPACITOR_NP_CC0402_0.1UF/16V_0.1uF/16V
C47 = General_CAP_POL: signal model: CAPACITOR_NP_CC0402_0.1UF/16V_0.1uF/16V
C2130-C2132 C2163-C2165 = General_CAP: User Part Number: HAMP; Tolerance: #TOL
D1 D2 D4 D6 = ESD_Bi-directional
F1-F8 = FUSE
FB1-FB6 = General_FB: Tolerance: #TOL; User Part Number: HAMP
H1 H2 = ME_ScrewHole
J1 = CON_OK-118RF050/2-35
J2 = CON_WAFER-MX1.25-13PCB
J3 J4 = CON_SATA_22P_FEMALE
J5 J6 = CON_U2_FEMAL
L5 L36 = General_IND_POWER
Q1 Q4 Q5 Q8 Q11 Q13 Q17 Q20 = MOS-Pchannel: Tolerance: #TOL; User Part Number: HAMP
Q3 Q7 Q12 Q19 = BJT_NPN: Tolerance: #TOL; User Part Number: HAMP
Q21-Q28 = MOS-Nchannel: User Part Number: HAMP; Tolerance: #TOL
R1 R2 R17 R19 R2929-R2938 = General_RES: signal model: GENERAL_RES_R0201_0R_0R
R3-R16 R21 R22 R2940-R2947 = General_RES
R23 = General_RES: signal model: R_CR0402_DISCRETE_100R_100R
R24-R26 R29-R32 R35 = General_RES: Tolerance: #TOL; User Part Number: HAMP; signal model: R_CR0402_DISCRETE_100R_100R
R40-R44 R49-R53 R55 R57 R58 R68 R69 R83 R87 R201 R2385 R2386 R2468-R2471 R2473 R2476 R2593 R2692 R2859-R2863 R2925 R2926 = General_RES: Tolerance: #TOL; User Part Number: HAMP
TP17 TP19 TP153 TP161 TP176-TP179 = General_TP
U1 = IDT_JMB585
U8 U98 = VRM_DC_SY8156
U27 = VRM_LDO_TLV75901
U75 = FLSAH_SPI_SOP8
Y1 = XTAL_4P

## Footprints (pads in the part's own frame, mm; a bottom-side part is the same pattern mirrored in y, then rotated)
C0201
  custom 0.294x0.3 smd: 1(-0.25,0) 2(0.25,0)
C0402
  rect 0.635x0.508 smd: 1(-0.508,0) 2(0.508,0)
C0603
  rect 0.889x0.813 smd: 1(-0.762,0) 2(0.762,0)
C0805
  rect 0.889x1.27 smd: 1(-0.956,0) 2(0.956,0)
CAP-SMD-D6_3
  rect 3.5x1.199 smd: 1(-2.67,0) 2(2.67,0)
CON13-1P25-21P4X6P7
  rect 0.813x1.93 smd: 1(-6.042,-0.008) 2(-4.792,-0.008) 3(-3.543,-0.008) 4(-2.293,-0.008) 5(-1.042,-0.008) 6(0.208,-0.008) 7(1.457,-0.008) 8(2.707,-0.008) 9(3.958,-0.008) 10(5.208,-0.008) 11(6.457,-0.008) 12(7.707,-0.008) 13(8.958,-0.008)
  rect 1.067x3.454 smd: 14(11.807,-4.908) 15(-8.893,-4.908)
CON50-0P35-OK-118RF
  rect 0.178x0.457 smd: 1(-4.16,0.77) 2(-3.81,0.77) 3(-3.46,0.77) 4(-3.11,0.77) 5(-2.76,0.77) 6(-2.41,0.77) 7(-2.06,0.77) 8(-1.71,0.77) 9(-1.36,0.77) 10(-1.01,0.77) 11(-0.66,0.77) 12(-0.31,0.77) 13(0.04,0.77) 14(0.39,0.77) 15(0.74,0.77) 16(1.09,0.77) 17(1.44,0.77) 18(1.79,0.77) 19(2.14,0.77) 20(2.49,0.77) 21(2.84,0.77) 22(3.19,0.77) 23(3.54,0.77) 24(3.89,0.77) 25(4.24,0.77) 26(4.24,-0.99) 27(3.89,-0.99) 28(3.54,-0.99) 29(3.19,-0.99) 30(2.84,-0.99) 31(2.49,-0.99) 32(2.14,-0.99) 33(1.79,-0.99) 34(1.44,-0.99) 35(1.09,-0.99) 36(0.74,-0.99) 37(0.39,-0.99) 38(0.04,-0.99) 39(-0.31,-0.99) 40(-0.66,-0.99) 41(-1.01,-0.99) 42(-1.36,-0.99) 43(-1.71,-0.99) 44(-2.06,-0.99) 45(-2.41,-0.99) 46(-2.76,-0.99) 47(-3.11,-0.99) 48(-3.46,-0.99) 49(-3.81,-0.99) 50(-4.16,-0.99)
  rect 0.711x0.381 smd: P1(-5.09,0.81) P4(-5.09,-1.03) P5(5.17,0.81) P8(5.17,-1.03)
  rect 0.254x0.356 smd: P2(-5.655,0.245) P3(-5.655,-0.465) P6(5.735,0.245) P7(5.735,-0.465)
DFN1006-2
  rect 0.559x0.61 smd: 1(-0.432,0) 2(0.419,0)
F0805
  rect 1x1.5 smd: 1(-1.1,0) 2(1.1,0)
F1210
  rect 1.485x2.781 smd: 1(-1.6,0) 2(1.6,0)
HOLE_C3R00_C5R00
  round 4.7 hole 3.7: 1(0,0)
L414120
  rect 0.991x3.81 smd: 1(-1.205,0) 2(1.205,0)
QFN76-0P4-9X9
  rect 1.016x0.203 smd: 1(-4.6,3.6) 2(-4.6,3.2) 3(-4.6,2.8) 4(-4.6,2.4) 5(-4.6,2) 6(-4.6,1.6) 7(-4.6,1.2) 8(-4.6,0.8) 9(-4.6,0.4) 10(-4.6,0) 11(-4.6,-0.4) 12(-4.6,-0.8) 13(-4.6,-1.2) 14(-4.6,-1.6) 15(-4.6,-2) 16(-4.6,-2.4) 17(-4.6,-2.8) 18(-4.6,-3.2) 19(-4.6,-3.6) 39(4.6,-3.6) 40(4.6,-3.2) 41(4.6,-2.8) 42(4.6,-2.4) 43(4.6,-2) 44(4.6,-1.6) 45(4.6,-1.2) 46(4.6,-0.8) 47(4.6,-0.4) 48(4.6,0) 49(4.6,0.4) 50(4.6,0.8) 51(4.6,1.2) 52(4.6,1.6) 53(4.6,2) 54(4.6,2.4) 55(4.6,2.8) 56(4.6,3.2) 57(4.6,3.6)
  rect 0.203x1.016 smd: 20(-3.6,-4.6) 21(-3.2,-4.6) 22(-2.8,-4.6) 23(-2.4,-4.6) 24(-2,-4.6) 25(-1.6,-4.6) 26(-1.2,-4.6) 27(-0.8,-4.6) 28(-0.4,-4.6) 29(0,-4.6) 30(0.4,-4.6) 31(0.8,-4.6) 32(1.2,-4.6) 33(1.6,-4.6) 34(2,-4.6) 35(2.4,-4.6) 36(2.8,-4.6) 37(3.2,-4.6) 38(3.6,-4.6) 58(3.6,4.6) 59(3.2,4.6) 60(2.8,4.6) 61(2.4,4.6) 62(2,4.6) 63(1.6,4.6) 64(1.2,4.6) 65(0.8,4.6) 66(0.4,4.6) 67(0,4.6) 68(-0.4,4.6) 69(-0.8,4.6) 70(-1.2,4.6) 71(-1.6,4.6) 72(-2,4.6) 73(-2.4,4.6) 74(-2.8,4.6) 75(-3.2,4.6) 76(-3.6,4.6)
  rect 6.325x6.325 smd: 77(0,0)
R0201
  custom 0.294x0.3 smd: 1(-0.25,0) 2(0.25,0)
R0402
  rect 0.635x0.508 smd: 1(-0.508,0) 2(0.508,0)
R1210
  rect 1.321x2.819 smd: 1(-1.435,0) 2(1.435,0)
SATA30_22P_V_DIP
  round 1.118 hole 0.813: 1(31.75,0) 2(30.48,0) 3(29.21,0) 4(27.94,0) 5(26.67,0) 6(25.4,0) 7(24.13,0) 8(17.78,0) 9(16.51,0) 10(15.24,0) 11(13.97,0) 12(12.7,0) 13(11.43,0) 14(10.16,0) 15(8.89,0) 16(7.62,0) 17(6.35,0) 18(5.08,0) 19(3.81,0) 20(2.54,0) 21(1.27,0) 22(0,0)
  round 3.124 hole 2.616: G1(-3.49,0) G2(20.95,0) G3(35.24,0)
SMD2016-4P
  rect 0.914x0.813 smd: 1(-0.686,-0.541) 2(0.714,-0.541) 3(0.714,0.559) 4(-0.686,0.559)
SOT23
  rect 0.889x1.016 smd: 1(1.016,1.27) 2(-1.016,1.27) 3(0,-1.27)
SOT-23
  rect 0.889x1.016 smd: 1(0,0) 2(-2.032,0) 3(-1.016,-2.54)
SSF-8639-4030683N
  round 1.321 hole 1.321 unplated: (-18.58,-1.56)
  round 0.914 hole 0.914 unplated: (18.58,-1.56)
  rect 0.61x2.032 smd: 1(15.875,0) 2(14.605,0) 3(13.335,0) 4(12.065,0) 5(10.795,0) 6(9.525,0) 7(8.255,0) 14(1.905,0) 15(0.635,0) 16(-0.635,0) 17(-1.905,0) 18(-3.175,0) 19(-4.445,0) 20(-5.715,0) 21(-6.985,0) 22(-8.255,0) 23(-9.525,0) 24(-10.795,0) 25(-12.065,0) 26(-13.335,0) 27(-14.605,0) 28(-15.875,0)
  rect 0.508x2.235 smd: 8(7.08,0.73) 9(6.28,0.73) 10(5.48,0.73) 11(4.68,0.73) 12(3.88,0.73) 13(3.08,0.73) 29(15.48,-3.78) 30(14.68,-3.78) 31(13.88,-3.78) 32(13.08,-3.78) 33(12.28,-3.78) 34(11.48,-3.78) 35(10.68,-3.78) 36(9.88,-3.78) 37(9.08,-3.78) 38(8.28,-3.78) 39(7.48,-3.78) 40(6.68,-3.78) 41(5.88,-3.78) 42(5.08,-3.78) 43(4.28,-3.78) 44(3.48,-3.78) 45(2.68,-3.78) 46(1.88,-3.78) 47(1.08,-3.78) 48(0.28,-3.78) 49(-0.52,-3.78) 50(-1.32,-3.78) 51(-2.12,-3.78) 52(-2.92,-3.78) 53(-3.72,-3.78) 54(-4.52,-3.78) 55(-5.32,-3.78) 56(-6.12,-3.78) 57(-6.92,-3.78) 58(-7.72,-3.78) 59(-8.52,-3.78) 60(-9.32,-3.78) 61(-10.12,-3.78) 62(-10.92,-3.78) 63(-11.72,-3.78) 64(-12.52,-3.78) 65(-13.32,-3.78) 66(-14.12,-3.78) 67(-14.92,-3.78) 68(-15.72,-3.78)
  rect 2.032x2.642 smd: 69(-21.8,-1.56) 70(21.8,-1.56)
TP_0_7MM
  round 0.711 smd: 1(0,0)
TSOT23-6
  rect 0.635x1.041 smd: 1(-0.95,-1.275) 2(0,-1.275) 3(0.95,-1.275) 4(0.95,1.275) 5(0,1.275) 6(-0.95,1.275)
TSSOP8-0P65-3X6P4
  rect 0.381x0.991 smd: 1(-0.975,-3) 2(-0.325,-3) 3(0.325,-3) 4(0.975,-3) 5(0.975,3) 6(0.325,3) 7(-0.325,3) 8(-0.975,3)
WSON6-0P65-2X2
  rect 0.45x0.3 smd: 1(-0.975,0.65) 2(-0.975,0) 3(-0.975,-0.65) 4(0.975,-0.65) 5(0.975,0) 6(0.975,0.65)
  rect 1x1.6 smd: 7(0,0)

## Nets
GND: C17.2 C18.2 C19.2 C20.2 C21.2 C22.2 C25.2 C27.2 C30.2 C31.2 C32.1 C33.1 C34.2 C35.2 C36.2 C39.2 C40.2 C42.2 C45.1 C46.1 C47.2 C48.2 C49.2 C50.2 C52.2 C53.2 C58.1 C59.1 C62.2 C63.2 C64.2 C65.2 C66.2 C67.2 C68.2 C71.2 C77.1 C78.1 C79.2 C80.2 C81.2 C82.2 C1577.2 C1578.2 C1676.2 C2125.2 C2126.2 C2127.2 C2130.2 C2131.2 C2132.2 C2133.2 C2134.2 C2135.2 C2136.2 C2137.2 C2138.2 C2139.2 C2140.2 C2141.2 C2142.2 C2143.2 C2144.2 C2145.2 C2146.2 C2147.2 C2148.2 C2149.2 C2150.2 C2151.2 C2152.2 C2153.2 C2154.2 C2155.2 C2156.2 C2158.2 C2159.2 C2160.2 C2163.2 C2164.2 C2165.2 C2166.2 C2171.2 C2172.2 C2173.2 C2174.2 C2175.2 C2176.2 C2177.2 C2178.2 C2179.2 C2180.2 C2181.2 C2182.2 C2183.2 C2184.2 C2185.2 C2186.2 C2187.2 C2188.2 C2189.2 C2190.2 C2191.2 C2192.2 C2193.2 C2194.2 C2195.2 C2196.2 C2197.2 C2198.2 D1.2 D2.2 D4.2 D6.2 H1.1 H2.1 J1.3 J1.6 J1.9 J1.12 J1.15 J1.18 J1.21 J1.24 J1.29 J1.32 J1.35 J1.42 J1.45 J1.48 J1.P1 J1.P2 J1.P3 J1.P4 J1.P5 J1.P6 J1.P7 J1.P8 J2.1 J2.2 J2.3 J2.4 J2.5 J2.14 J2.15 J3.1 J3.4 J3.7 J3.12 J3.13 J3.17 J3.18 J3.19 J3.G1 J3.G2 J3.G3 J4.1 J4.4 J4.7 J4.12 J4.13 J4.17 J4.18 J4.19 J4.G1 J4.G2 J4.G3 J5.1 J5.4 J5.7 J5.18 J5.19 J5.31 J5.34 J5.37 J5.39 J5.42 J5.45 J5.47 J5.50 J5.53 J5.56 J5.59 J5.62 J5.65 J5.69 J5.70 J6.1 J6.4 J6.7 J6.18 J6.19 J6.31 J6.34 J6.37 J6.39 J6.42 J6.45 J6.47 J6.50 J6.53 J6.56 J6.59 J6.62 J6.65 J6.69 J6.70 Q3.2(EMITTER) Q7.2(EMITTER) Q12.2(EMITTER) Q19.2(EMITTER) Q21.2(S) Q22.2(S) Q23.2(S) Q24.2(S) Q25.2(S) Q26.2(S) Q27.2(S) Q28.2(S) R21.2 R22.2 R29.1 R35.1 R43.1 R50.2 R58.2 R83.2 R201.2 R2862.2 R2863.2 R2926.2 TP17.1 TP161.1 TP177.1 U1.77 U8.3 U27.3 U27.7 U75.4 U98.3 Y1.2 Y1.4(GND1)
VCC1V25: C2129.2 C2130.1 C2131.1 C2132.1 C2133.1 FB1.1 FB2.1 FB3.1 FB4.1 L36.2 R2860.2 TP176.1
VCCK: C2134.1 C2135.1 C2136.1 C2137.1 C2138.1 C2171.1 C2172.1 C2173.1 C2174.1 FB1.2 U1.5 U1.16 U1.38 U1.62 U1.75
VCCO: C2143.1 C2144.1 C2187.1 C2188.1 C2189.1 C2190.1 FB5.2 U1.1 U1.14
VCCO33: C1578.1 C1579.2 C1676.1 FB5.1 FB6.1 R23.1 R2386.2 R2468.1 R2469.1 R2470.1 TP153.1 U27.1(OUT) U75.8
VDD_3V3_AUX: C19.1 C62.1 C63.1 C79.1 C80.1 J2.6 J5.10 J6.10 R49.2 R57.2
VDD_5V_DB: C1577.1 C2157.2 C2163.1 C2164.1 C2165.1 C2166.1 L5.2 Q4.2(S) Q8.2(S) Q13.2(S) Q20.2(S) R87.2 R2385.1 TP19.1 U27.6
VDD_12V_DB: C17.1 C18.1 C25.1 C26.1 C30.1 C36.1 C37.1 C39.1 C49.1 C50.1 C51.1 C66.1 C71.1 C72.1 C2125.1 C2126.1 C2127.1 C2158.1 C2159.1 C2160.1 J2.8 J2.9 J2.10 J2.11 J2.12 J2.13 Q1.2(S) Q5.2(S) Q11.2(S) Q17.2(S) R24.1 R25.1 R30.1 R32.1 R40.1 R41.1 R51.1 R52.1 R2859.1 R2925.1 U8.4(VIN) U98.4(VIN)
DPE_CLKN1: J1.50 R19.2
DPE_CLKN2: J1.5 R2930.2
DPE_CLKN3: R2.2 U1.23
DPE_CLKP1: J1.49 R17.2
DPE_CLKP2: J1.4 R2929.2
DPE_CLKP3: R1.2 U1.24
DPE_CLKREQN1: J5.11 R10.1
DPE_CLKREQN2: J6.11 R12.1
DPE_CLKREQN3: R14.1 U1.21
DPE_PERSTN: J5.12 J6.12 R16.2 U1.22
DPE_RXN2: J1.47 R2931.2
DPE_RXN3: J1.44 R2933.2
DPE_RXN8: C3.1 U1.29
DPE_RXN9: C8.1 U1.36
DPE_RXP2: J1.46 R2932.2
DPE_RXP3: J1.43 R2934.2
DPE_RXP8: C4.1 U1.30
DPE_RXP9: C7.1 U1.37
DPE_TXN2: C60.2 J1.2
DPE_TXN3: C74.2 J1.8
DPE_TXN8: R2935.2 U1.26
DPE_TXN9: R2937.2 U1.33
DPE_TXP2: C54.2 J1.1
DPE_TXP3: C73.2 J1.7
DPE_TXP8: R2936.2 U1.27
DPE_TXP9: R2938.2 U1.34
HDD1_PRSNTN: D1.1 J3.11 R9.1
HDD1_PWR_EN: R3.1 R69.1
HDD2_PRSNTN: D2.1 J4.11 R11.1
HDD2_PWR_EN: R4.1 R68.1
HDD3_PRSNTN: D4.1 J5.25 R13.1
HDD3_PWR_EN: R7.1 R44.1
HDD4_PRSNTN: D6.1 J6.25 R15.1
HDD4_PWR_EN: R8.1 R55.1
OFF_CTRL1: C26.2 Q1.1 Q4.1 Q21.1 Q22.1 R26.2
OFF_CTRL2: C37.2 Q5.1 Q8.1 Q23.1 Q24.1 R31.2
OFF_CTRL3: C51.2 Q11.1 Q13.1 Q25.1 Q26.1 R42.2
OFF_CTRL4: C72.2 Q17.1 Q20.1 Q27.1 Q28.1 R53.2
P_AVDDL: C2139.1 C2140.1 C2141.1 C2142.1 C2175.1 C2176.1 C2177.1 C2178.1 FB2.2 U1.25 U1.28 U1.32 U1.35
S_AVDDL: C2146.1 C2147.1 C2148.1 C2149.1 C2150.1 C2151.1 C2152.1 C2153.1 C2154.1 C2155.1 C2179.1 C2180.1 C2181.1 C2182.1 FB3.2 U1.39 U1.42 U1.45 U1.48 U1.51 U1.54 U1.63 U1.66 U1.69 U1.72
SATA1_5V: C34.1 F1.2 J3.14 J3.15 J3.16(V5_1) R2941.1
SATA1_12V: C35.1 F2.2 J3.20 J3.21 J3.22 R2940.1
SATA1_RXM: C24.2 U1.41
SATA1_RXP: C29.2 U1.40
SATA1_TXM: C23.2 U1.43
SATA1_TXP: C28.2 U1.44
SATA2_5V: C47.1 F3.2 J4.14 J4.15 J4.16(V5_1) R2943.1
SATA2_12V: C48.1 F4.2 J4.20 J4.21 J4.22 R2942.1
SATA2_RXM: C43.2 U1.53
SATA2_RXP: C44.2 U1.52
SATA2_TXM: C38.2 U1.55
SATA2_TXP: C41.2 U1.56
SATA3_5V: C64.1 F5.2 J5.20 J5.21 J5.22 R2945.1
SATA3_12V: C65.1 F6.2 J5.26 J5.27 J5.28 R2944.1
SATA3_RXM: C61.2 U1.71
SATA3_RXP: C57.2 U1.70
SATA3_TXM: C56.2 U1.73
SATA3_TXP: C55.2 U1.74
SATA4_5V: C81.1 F7.2 J6.20 J6.21 J6.22 R2947.1
SATA4_12V: C82.1 F8.2 J6.26 J6.27 J6.28 R2946.1
SATA4_RXM: C75.2 U1.65
SATA4_RXP: C76.2 U1.64
SATA4_TXM: C70.2 U1.67
SATA4_TXP: C69.2 U1.68
SATA_CON1_5V: C32.2 C33.2 F1.1 Q4.3
SATA_CON1_12V: C27.1 C31.1 F2.1 Q1.3
SATA_CON2_5V: C45.2 C46.2 F3.1 Q8.3
SATA_CON2_12V: C40.1 C42.1 F4.1 Q5.3
SATA_CON3_5V: C58.2 C59.2 F5.1 Q13.3
SATA_CON3_12V: C52.1 C53.1 F6.1 Q11.3
SATA_CON4_5V: C77.2 C78.2 F7.1 Q20.3
SATA_CON4_12V: C67.1 C68.1 F8.1 Q17.3
SPI_CE: R2471.2 U1.13
SPI_CK: R2473.2 U1.18
SPI_SI: R2692.2 U1.19
SPI_SO: R2476.2 U1.15
SPI_WPN: R2469.2 U1.17 U75.3(WP#/IO2)
U21_I2C10_SCL: J6.66 R5.1
U21_I2C10_SDA: J6.67 R6.1
XAVDDH: C2145.1 C2191.1 C2192.1 C2193.1 C2194.1 FB6.2 U1.61
XAVDDL: C2156.1 C2183.1 C2184.1 C2185.1 C2186.1 FB4.2 U1.58(XAVDDL)
XIN: C21.1 U1.59 Y1.3
XOUT: C20.1 U1.60 Y1.1
N32444929: C55.1 J5.2
N32444933: C56.1 J5.3
N32444973: C61.1 J5.5
N32445859: Q12.3 R41.2 R42.1
N32445911: C2197.1 Q12.1 R40.2 R43.2 R44.2
N32455769: J5.29 R17.1
N32455776: J5.30 R19.1
N32455848: C54.1 J5.32
N32455855: C60.1 J5.33
N32455880: J5.35 R2931.1
N32455887: J5.36 R2932.1
N32498011: J5.68 R49.1 R50.1
N32547892: C28.1 J3.2
N32547896: C23.1 J3.3
N32547936: C24.1 J3.5
N32547940: C29.1 J3.6
N32548137: C41.1 J4.2
N32548141: C38.1 J4.3
N32548181: C43.1 J4.5
N32548185: C44.1 J4.6
N32589789: J6.29 R2929.1
N32589847: J6.30 R2930.1
N32589961: C73.1 J6.32
N32590004: C69.1 J6.2
N32590006: C74.1 J6.33
N32590026: C70.1 J6.3
N32590057: J6.35 R2933.1
N32590084: C75.1 J6.5
N32590086: J6.36 R2934.1
N32590496: J6.68 R57.1 R58.1
N32595116: R21.1 U1.57
N32595121: R22.1 U1.31
N32595209: C22.1 R23.2 U1.2
N32613484: R2468.2 U75.7
N32613486: R2470.2 R2471.1 U75.1
N32613533: R2473.1 U75.6
N32613562: R2692.1 U75.5
N32613586: R2476.1 U75.2
N32623785: C2128.1 L36.1 U98.5
N32623942: R2859.2 R2862.1 U98.2
N32623955: C2128.2 R2861.2
N32623961: R2861.1 U98.6
N32623965: C2129.1 R2860.1 R2863.1 U98.1
N32624878: C1579.1 R201.1 R2386.1 U27.2
N32624901: R2385.2 U27.4
N32628883: C2161.1 L5.1 U8.5
N32629020: C2157.1 R83.1 R87.1 U8.1
N32629032: C2161.2 R2593.2
N32629034: R2925.2 R2926.1 U8.2
N32629127: R2593.1 U8.6
N32662558: J1.39 R9.2
N32662599: J1.38 R11.2
N32662640: J1.37 R13.2
N32662665: J1.36 R15.2
N32662668: J1.25 R16.1
N32663713: J1.41 R7.2
N32663717: J1.40 R8.2
N32663945: J1.34 R3.2
N32663949: J1.33 R4.2
N32663985: J1.31 R5.2
N32663989: J1.30 R6.2
N32664261: J1.28 R10.2
N32664281: J1.27 R12.2
N32664285: J1.26 R14.2
N32664505: J1.10 R2.1
N32664525: J1.11 R1.1
N32665094: J1.13 R2935.1
N32665139: J1.14 R2936.1
N32665204: C3.2 J1.16
N32665224: C4.2 J1.17
N32665319: J1.19 R2937.1
N32665364: J1.20 R2938.1
N32665409: C8.2 J1.22
N32665457: C7.2 J1.23
N32693265: C57.1 J5.6
N32693602: C76.1 J6.6
N32731761: C2195.1 Q3.1 R24.2 R29.2 R69.2
N32731773: Q3.3 R25.2 R26.1
N32732099: Q7.3 R31.1 R32.2
N32732101: C2196.1 Q7.1 R30.2 R35.2 R68.2
N32733250: Q23.3 R2942.2
N32735657: C2198.1 Q19.1 R51.2 R55.2
N32735669: Q19.3 R52.2 R53.1
N32739150: Q26.3 R2945.2
N32753681: Q25.3 R2944.2
N32759704: J5.66 TP178.1
N32759707: J5.67 TP179.1
N32770221: Q21.3 R2940.2
N32770570: Q22.3 R2941.2
N32771450: Q24.3 R2943.2
N32774336: Q27.3 R2946.2
N32774881: Q28.3 R2947.2

Pads without a net: J2 7; J3 8 9 10; J4 8 9 10; J5 8 9 13 14 15 16 17 23 24 38 40 41 43 44 46 48 49 51 52 54 55 57 58 60 61 63 64; J6 8 9 13 14 15 16 17 23 24 38 40 41 43 44 46 48 49 51 52 54 55 57 58 60 61 63 64; U1 3 4 6 7 8 9 10 11 12 20 46 47 49 50 76; U27 5

## Via types
v1: diameter 0.559, hole 0.254, TOP to BOTTOM, 1080 vias
v2: diameter 0.406, hole 0.203, TOP to BOTTOM, 318 vias

## Routing (per net, layer and track width the routed paths; a pad name or vN(x,y) marks a point on that pad's centre or on a via; arc(x,y) is an arc through that point)
GND: length 334.1
  TOP w0.381: J6.39 v1(54.79,75.25) ; 94.41,70.67 J4.4 92.43,70.67 ; J4.G2 93.42,79.65 ; J4.G2 95.41,77.66 ; J4.G2 93.42,75.66 ; 92.43,85.91 J4.12 94.41,85.91 ; J6.47 v1(54.79,81.65) ; J3.7 128.42,75.47 ; J3.7 127.43,74.48 ; J3.7 129.41,74.48 ; J4.1 94.41,66.86 ; J4.1 92.43,66.86 ; J4.1 93.42,65.86 ; 92.43,87.18 J4.13 94.41,87.18 ; J5.34 v1(19.79,71.25) ; J6.42 v1(54.79,77.65) ; v1(23.41,59.42) J5.70 v1(23.41,62.37) ; J3.19 129.49,94.8 ; J5.37 v1(19.79,73.65) ; J5.50 v1(19.79,84.05) ; J6.59 v1(54.79,91.25) ; 92.43,74.48 J4.7 ; J4.7 93.42,75.47 ; J4.7 94.41,74.48 ; J6.18 v1(58.57,85.91) ; J3.G2 128.42,79.65 ; J3.G2 128.42,75.66 ; J3.G2 130.41,77.66 ; J5.31 v1(19.79,68.85) ; J3.1 129.41,66.86 ; J3.1 127.43,66.86 ; J3.1 128.42,65.86 ; J4.G3 95.41,63.37 ; J4.G3 93.42,65.36 ; J4.G3 93.42,61.37 ; J6.50 v1(54.79,84.05) ; J5.42 v1(19.79,77.65) ; J5.18 v1(23.57,85.91) ; J3.G3 128.42,65.36 ; J3.G3 130.41,63.37 ; J3.G3 128.42,61.37 ; v1(58.41,103.02) J6.69 v1(58.41,105.97) ; 129.41,70.67 J3.4 127.43,70.67 ; J6.19 v1(58.57,87.18) ; v1(58.41,62.37) J6.70 v1(58.41,59.42) ; J4.18 94.41,93.53 ; J5.53 v1(19.79,86.45) ; J4.19 94.41,94.8 ; J6.56 v1(54.79,88.85) ; J6.53 v1(54.79,86.45) ; J6.1 v1(61.38,66.86) ; J5.59 v1(19.79,91.25) ; J6.37 v1(54.79,73.65) ; J6.34 v1(54.79,71.25) ; J6.65 v1(54.79,96.05) ; J6.45 v1(54.79,80.05) ; J4.17 94.52,92.26 ; J5.45 v1(19.79,80.05) ; v1(23.41,103.02) J5.69 v1(23.41,105.97) ; J6.4 v1(61.38,70.67) ; J3.18 129.49,93.53 ; J5.39 v1(19.79,75.25) ; J3.17 129.49,92.26 ; J5.62 v1(19.79,93.65) ; J6.31 v1(54.79,68.85) ; J5.56 v1(19.79,88.85) ; J5.47 v1(19.79,81.65) ; J6.62 v1(54.79,93.65) ; J6.7 v1(61.38,74.48) ; J5.7 v1(26.38,74.48) ; J5.4 v1(26.38,70.67) ; J5.19 v1(23.57,87.18) ; J5.65 v1(19.79,96.05) ; J5.1 v1(26.38,66.86)
  GND02 w0.381: J4.G3 95.41,63.37 ; J4.G3 91.43,63.37 ; J4.G3 93.42,61.37 ; J4.G3 93.42,65.36 ; J3.7 128.42,75.47 ; J3.7 129.41,74.48 ; J3.7 127.43,74.48 ; 92.43,87.18 J4.13 94.41,87.18 ; 129.41,85.91 J3.12 127.43,85.91 ; 127.43,66.86 J3.1 ; J3.1 128.42,65.86 ; J3.1 129.41,66.86 ; 94.41,93.53 J4.18 92.43,93.53 ; 92.43,66.86 J4.1 ; J4.1 94.41,66.86 ; J4.1 93.42,65.86 ; J3.G3 128.42,65.36 ; J3.G3 130.41,63.37 ; J3.G3 128.42,61.37 ; J3.G3 126.43,63.37 ; 93.42,75.66 J4.G2 ; J4.G2 91.43,77.66 ; J4.G2 93.42,79.65 ; J4.G2 95.41,77.66 ; 128.42,75.66 J3.G2 ; J3.G2 130.41,77.66 ; J3.G2 128.42,79.65 ; J3.G2 126.43,77.66 ; 94.41,70.67 J4.4 92.43,70.67 ; 92.43,94.8 J4.19 94.41,94.8 ; 127.43,70.67 J3.4 129.41,70.67 ; 91.43,102.1 J4.G1 ; J4.G1 93.42,104.09 ; J4.G1 93.42,100.1 ; J4.7 94.41,74.48 ; J4.7 92.43,74.48 ; J4.7 93.42,75.47 ; 129.41,94.8 J3.19 127.43,94.8 ; 129.41,87.18 J3.13 127.43,87.18 ; 94.41,85.91 J4.12 92.43,85.91
  PWR03 w0.381: 91.43,77.66 J4.G2 ; J4.G2 93.42,79.65 ; J4.G2 95.41,77.66 ; J4.G2 93.42,75.66 ; 94.41,70.67 J4.4 92.43,70.67 ; 94.41,85.91 J4.12 92.43,85.91 ; 129.41,85.91 J3.12 127.43,85.91 ; 93.42,61.37 J4.G3 ; J4.G3 91.43,63.37 ; J4.G3 93.42,65.36 ; J4.G3 95.41,63.37 ; 128.42,75.66 J3.G2 ; J3.G2 128.42,79.65 ; J3.G2 130.41,77.66 ; J3.G2 126.43,77.66 ; J4.1 94.41,66.86 ; J4.1 93.42,65.86 ; J4.1 92.43,66.86 ; 94.41,93.53 J4.18 92.43,93.53 ; 94.41,87.18 J4.13 92.43,87.18 ; 128.42,61.37 J3.G3 ; J3.G3 126.43,63.37 ; J3.G3 130.41,63.37 ; J3.G3 128.42,65.36 ; J4.7 93.42,75.47 ; J4.7 94.41,74.48 ; J4.7 92.43,74.48 ; 129.41,87.18 J3.13 127.43,87.18 ; 127.43,94.8 J3.19 129.41,94.8 ; 128.42,65.86 J3.1 ; J3.1 129.41,66.86 ; J3.1 127.43,66.86 ; 94.41,94.8 J4.19 92.43,94.8 ; 129.37,93.53 J3.18 127.55,93.53 ; J3.7 129.41,74.48 ; J3.7 128.42,75.47 ; J3.7 127.43,74.48 ; 129.37,92.26 J3.17 127.55,92.26 ; 129.41,70.67 J3.4 127.43,70.67 ; 91.43,102.1 J4.G1
  BOTTOM w0.178: J1.32 v2(136.63,102.89) ; J1.35 v2(136.63,103.94) ; J1.12 v2(135.72,105.34) ; J1.21 v2(135.72,102.19) ; J1.42 v2(136.63,106.39) ; J1.15 v2(135.72,104.29) ; J1.3 v2(135.72,108.49) ; J1.48 v2(136.63,108.49) ; J1.29 v2(136.63,101.84) ; J1.9 v2(135.72,106.39) ; J1.18 v2(135.72,103.24) ; J1.6 v2(135.72,107.44) ; J1.24 v2(135.72,101.14) ; J1.45 v2(136.63,107.44)
  BOTTOM w0.254: C22.2 C2143.2 v2(100.53,121.6) ; C2148.2 v2(106.75,108.39) ; C2155.2 v2(97.48,116.9) ; C2146.2 97.36,113.27 v2(97.18,113.09) 97.36,113.09 97.64,112.81 C2137.2 ; C2140.2 v2(111.2,115.25) ; C2144.2 v2(105.61,121.34) ; C2147.2 v2(107.9,108.39) ; R21.2 v2(100.78,108.39) ; C2151.2 v2(103.2,108.39) ; C2134.2 v2(97.48,118.04) ; C2153.2 v2(97.48,115.63) ; C2139.2 v2(111.2,112.45) ; J1.P7 136.53,99.82 v1(136.49,99.86) ; J1.P3 136.53,110.14 v1(136.52,110.12) ; C2138.2 102.44,121.47 v2(102.31,121.6) ; C2136.2 v2(111.2,111.31) ; C2154.2 v2(97.48,114.49) ; J1.P2 135.82,110.15 v1(135.79,110.12) ; R22.2 C2142.2 v2(111.2,113.57) ; C2141.2 v2(111.2,116.39) ; v1(135.82,99.86) 135.82,99.86 J1.P6 ; C2152.2 v2(101.93,108.39) ; C2149.2 v2(104.34,108.39) ; C2150.2 v2(105.48,108.39) ; C2135.2 v2(106.75,121.73)
  BOTTOM w0.381: J4.G3 95.41,63.37 ; J4.G3 93.42,61.37 ; J4.G3 91.43,63.37 ; J4.G3 93.42,65.36 ; C2190.2 v1(96.47,123.63) C2188.2 ; v1(64.4,117.41) U98.3 v1(63.7,116.51) ; J1.P1 v1(135.79,110.12) ; J3.12 129.46,85.91 ; 93.42,65.86 J4.1 ; J4.1 94.41,66.86 ; J4.1 92.43,66.86 ; C2186.2 v2(93.29,109.03) C2184.2 ; R43.1 v1(19.89,42.99) ; v1(26.38,74.48) 25.3,73.4 C62.2 ; Q7.2 v1(92.93,38.54) ; C1676.2 v1(91.64,123.63) ; R35.1 v1(89.89,42.99) ; v1(58.46,92.26) 58.75,92.55 D6.2 ; 55.57,42.86 v1(54.94,42.86) ; J3.19 129.61,94.8 ; C2180.2 v2(93.29,107.88) C2182.2 ; C2197.2 v1(19.89,44) ; C2178.2 v1(112.34,120.58) C2176.2 ; v1(57.6,73.72) 57.93,74.05 C80.2 ; v1(14.24,20.76) U8.3 v1(13.54,19.87) ; Q19.2 v1(57.93,38.54) ; J4.7 94.41,74.48 ; Q12.2 v1(22.93,38.54) ; J3.1 129.41,66.86 ; J3.1 127.43,66.86 ; J3.1 128.42,65.86 ; U75.4 v2(97.57,119.23) ; v1(22.68,73.72) 22.93,73.97 C63.2 ; C2196.2 v1(89.86,44) ; J1.P5 v1(135.82,99.86) ; R50.2 v1(17.02,98.1) ; C2172.2 101.67,123.63 v2(101.85,123.45) 102.03,123.63 C2174.2 ; J3.17 129.61,92.26 ; D4.2 27.42,94.97 v1(26.62,94.17) ; C2191.2 v2(91.51,111.18) C2193.2 ; C2183.2 v2(91.51,109.03) C2185.2 ; J4.4 94.41,70.67 ; R2926.2 v1(13.54,17.33) ; C2177.2 v1(112.34,122.36) C2175.2 ; C2173.2 100.38,123.48 v2(100.02,123.48) 99.79,123.48 C2171.2 ; D1.2 v1(122.88,93.53) ; C2187.2 v1(94.69,123.63) C2189.2 ; C79.2 60.3,73.4 v1(61.38,74.48) ; C2179.2 v2(91.51,107.88) C2181.2 ; C2195.2 v1(124.91,43.87) ; J1.P4 v1(136.52,110.12) ; R58.2 v1(51.84,98.1) ; J3.18 129.61,93.53 ; Q3.2 v1(127.93,38.54) ; D2.2 v1(88.21,92.26) ; J3.13 129.46,87.18 ; R83.2 v1(16.2,16.57) ; J1.P8 v1(136.49,99.86) ; C19.2 v1(13.79,103.06) ; C2192.2 v2(93.8,111.18) ; R29.1 v1(124.89,42.99)
  BOTTOM w0.635: J3.G3 130.49,63.37 ; J3.G3 126.35,63.37 ; J3.G3 128.42,65.44 ; J3.G3 128.42,61.3
  vias: v1(0.76,119.66) v1(0.76,115.85) v1(0.76,112.04) v1(0.76,108.23) v1(0.76,104.42) v1(0.76,100.61) v1(0.76,96.8) v1(0.76,92.99) v1(0.76,89.18) v1(1.6,118.04) v1(1.6,95.56) v1(2.6,118.04) v1(2.6,95.56) v1(2.66,103.21) v1(2.66,92.74) v1(2.82,112.07) v1(3.15,97.8) v1(3.6,118.04) v1(3.6,95.56) v1(3.68,119.54) v1(3.86,106.64) v1(4.05,121.59) v1(4.09,114.74) v1(4.14,101.35) v1(4.3,87.76) v1(6.19,124.74) v1(6.35,119.79) v1(6.55,104.45) v1(6.55,103.45) v1(6.55,102.45) v1(6.55,101.45) v1(6.55,100.45) v1(6.55,99.45) v1(6.55,98.45) v1(6.7,93.4) v1(6.98,88.48) v1(7.26,85.37) v1(7.26,81.56) v1(7.26,77.75) v1(7.26,73.94) v1(7.26,70.13) v1(7.26,66.32) v1(7.26,62.51) v1(7.26,58.7) v1(7.26,54.89) v1(7.26,51.08) v1(7.26,47.27) v1(7.26,43.46) v1(7.26,39.65) v1(7.26,35.84) v1(7.26,32.03) v1(7.26,28.22) v1(7.26,24.41) v1(7.26,20.6) v1(7.26,16.79) v1(7.26,12.98) v1(7.26,9.17) v1(7.26,5.36) v1(7.26,1.55) v1(7.31,123.2) v1(8.15,121.29) v1(8.33,29.52) v1(8.33,28.63) v1(8.53,95.87) v1(9.07,10.98) v1(9.07,3.59) v1(9.34,104.45) v1(9.34,103.45) v1(9.34,102.45) v1(9.34,101.45) v1(9.34,100.45) v1(9.34,99.45) v1(9.34,98.45) v1(9.47,118.83) v1(9.7,117) v1(10,124.74) v1(10.21,122.59) v1(10.74,20.13) v1(10.74,19.24) v1(10.99,0.76) v1(12.21,4.37) v1(12.39,20.13) v1(12.39,19.24) v1(12.65,122) v1(12.65,118.19) v1(12.77,43.49) v1(13.13,123.99) v1(13.36,8) v1(13.54,42.99) v1(13.54,41.84) v1(13.82,111.46) v1(13.97,98.31) v1(14.02,92.46) v1(14.12,85.66) v1(14.17,78.6) v1(14.22,105.04) v1(14.82,111.46) v1(15.26,107.63) v1(15.42,106.49) v1(15.57,36.76) v1(15.72,101.28) v1(15.72,96.71) v1(15.72,91.5) v1(15.72,87.33) v1(15.72,80.68) v1(15.95,108.52) v1(16.03,68.92) v1(16.12,116.62) v1(16.2,71.84) v1(16.2,36.76) v1(16.2,35.11) v1(16.38,58.2) v1(16.43,60.08) v1(16.71,106.46) v1(16.95,108.52) v1(17.02,102.93) v1(17.02,89.37) v1(17.04,84.16) v1(17.04,77.1) v1(17.15,8.45) v1(17.6,43.49) v1(17.7,108.54) v1(17.7,60.08) v1(17.65,58.2) v1(17.86,122.78) v1(17.86,1.58) v1(17.96,72.55) v1(17.9,67.65) v1(18.16,110.9) v1(18.36,91.75) v1(18.36,42.99) v1(18.36,41.84) v1(18.41,87.1) v1(18.46,78.75) v1(18.46,74.3) v1(18.53,106.51) v1(18.51,82.94) v1(18.67,108.52) v1(18.82,21.06) v1(18.82,20.18) v1(18.98,119.14) v1(18.97,60.08) v1(18.92,58.2) v1(19.11,5.18) v1(19.3,110.32) v1(20.06,102.85) v1(20.22,21.06) v1(20.22,20.18) v1(20.77,2.62) v1(20.85,122.69) v1(21.03,15.68) v1(21.33,111.54) v1(21.56,124.74) v1(21.58,0.76) v1(21.66,116.57) v1(21.69,99.98) v1(21.61,21.06) v1(21.61,20.18) v1(21.64,11.97) v1(22.3,18.47) v1(22.55,30.67) v1(22.78,47.25) v1(23.38,51.2) v1(23.43,53.08) v1(23.44,30.67) v1(24.7,53.08) v1(24.65,51.2) v1(24.76,99.98) v1(24.89,107.32) v1(25.27,103.18) v1(25.37,124.74) v1(25.32,24.21) v1(25.39,0.76) v1(25.6,110.73) v1(25.55,41.21) v1(25.55,30.82) v1(25.97,53.08) v1(25.92,51.2) v1(25.93,19.54) v1(26.29,118.27) v1(26.64,115.68) v1(26.62,82.86) v1(26.74,91.12) v1(27.28,120.99) v1(27.48,108.29) v1(28.11,68.92) v1(28.11,65.11) v1(28.11,61.3) v1(28.11,57.49) v1(28.11,53.68) v1(28.11,49.87) v1(28.11,46.06) v1(28.11,42.25) v1(28.11,38.44) v1(28.11,34.63) v1(28.11,30.82) v1(28.11,27.01) v1(28.11,23.2) v1(28.11,19.39) v1(28.24,103.13) v1(28.28,15.59) v1(28.78,99.88) v1(29.18,124.74) v1(29.2,0.76) v1(29.46,117.43) v1(29.87,110.88) v1(30.11,12.24) v1(30.6,122) v1(30.76,119.82) v1(32.51,108.34) v1(32.69,106.31) v1(32.89,117.28) v1(32.99,124.74) v1(33.01,0.76) v1(33.12,110.83) v1(33.43,10.39) v1(34.03,120.18) v1(34.97,6.31) v1(35.02,115.86) v1(35.1,110.7) v1(36.14,122.39) v1(36.8,124.74) v1(36.78,107.53) v1(36.82,0.76) v1(37.23,118.96) v1(37.24,10.58) v1(38.25,122.89) v1(38.33,103.03) v1(39.09,117.05) v1(39.11,110.8) v1(39.62,106.92) v1(40.1,121.45) v1(40.36,12.77) v1(40.61,124.74) v1(40.66,108.26) v1(40.63,0.76) v1(40.83,100.76) v1(40.99,119.79) v1(41.76,118.42) v1(41.89,97.1) v1(41.89,93.29) v1(41.89,89.48) v1(41.89,85.67) v1(41.89,81.86) v1(41.89,78.05) v1(41.89,74.24) v1(41.89,70.43) v1(41.89,66.62) v1(41.89,62.81) v1(41.89,59) v1(41.89,55.19) v1(41.89,51.38) v1(41.89,47.57) v1(41.89,43.76) v1(41.89,39.95) v1(41.89,36.14) v1(41.89,32.33) v1(41.89,28.52) v1(41.89,24.71) v1(41.89,20.9) v1(41.89,17.09) v1(41.96,122.89) v1(42.06,102.24) v1(42.26,110.85) v1(42.39,82.79) v1(42.77,107.07) v1(42.82,13.8) v1(43.18,116.87) v1(43.61,34.96) v1(44.07,92.95) v1(44.19,122.49) v1(44.17,25.33) v1(44.19,21.24) v1(44.37,105.72) v1(44.35,95.06) v1(44.42,124.74) v1(44.42,97.87) v1(44.44,0.76) v1(44.52,30.31) v1(44.65,120.15) v1(44.68,102.95) v1(44.65,17.59) v1(44.78,31.81) v1(44.96,108.19) v1(45.31,116.26) v1(45.72,101) v1(45.9,60.89) v1(46,110.9) v1(46,68.13) v1(46.12,98.05) v1(46.15,94.78) v1(46.2,75.37) v1(46.33,82.13) v1(46.78,89.29) v1(47.04,96.38) v1(47.14,120.69) v1(47.11,107.07) v1(47.12,4.83) v1(47.77,43.49) v1(47.95,102.83) v1(48.16,100.03) v1(48.11,98.23) v1(48.21,124.35) v1(48.23,1.19) v1(48.54,42.99) v1(48.54,41.84) v1(48.54,13.72) v1(48.63,117.19) v1(48.66,18.32) v1(48.74,8.28) v1(49.25,105.85) v1(49.38,110.88) v1(49.78,70.95) v1(49.81,37.4) v1(49.81,36.38) v1(49.81,35.24) v1(49.96,66.48) v1(50.24,24.19) v1(50.59,101.23) v1(50.57,93.86) v1(50.57,87.18) v1(50.54,83.29) v1(50.54,78.65) v1(50.62,63.28) v1(50.77,115.83) v1(50.72,55) v1(51.13,72.07) v1(51.13,24.19) v1(51.25,106.99) v1(51.38,58.2) v1(51.43,60.08) v1(51.84,102.32) v1(51.81,96.15) v1(51.81,87.03) v1(51.86,82.53) v1(51.89,77.2) v1(52.02,24.19) v1(52.14,73.31) v1(52.25,68.54) v1(52.37,64.47) v1(52.44,117.1) v1(52.52,108.19) v1(52.6,43.49) v1(52.55,8.21) v1(52.7,60.08) v1(52.65,58.2) v1(52.9,124.16) v1(53.08,1.03) v1(53.36,42.99) v1(53.36,41.84) v1(53.97,60.08) v1(53.92,58.2) v1(54.08,120.54) v1(54.06,4.71) v1(54.18,24.19) v1(54.56,102.17) v1(55.04,46.08) v1(55.06,24.19) v1(55.42,122.94) v1(55.95,24.19) v1(56.44,113.88) v1(56.46,100.36) v1(56.54,119.21) v1(56.67,124.74) v1(56.64,20.61) v1(56.88,0.76) v1(57.2,121.83) v1(57.12,10.9) v1(57.63,114.99) v1(57.99,31.94) v1(57.99,27.62) v1(58.38,51.2) v1(58.43,53.08) v1(59.18,121.55) v1(59.56,44.1) v1(59.7,53.08) v1(59.65,51.2) v1(59.81,115.02) v1(59.99,123.35) v1(60.04,100.29) v1(60.48,124.74) v1(60.42,30.11) v1(60.7,37.78) v1(60.69,0.76) v1(60.91,116.77) v1(60.91,115.88) v1(60.97,53.08) v1(60.92,51.2) v1(61.41,114.74) v1(61.52,23.2) v1(61.67,91.12) v1(61.67,82.86) v1(61.69,71.89) v1(61.85,68.03) v1(62.56,116.77) v1(62.56,115.88) v1(62.91,7.7) v1(63.11,68.92) v1(63.11,65.11) v1(63.11,61.3) v1(63.11,57.49) v1(63.11,53.68) v1(63.11,49.87) v1(63.11,46.06) v1(63.11,42.25) v1(63.11,38.44) v1(63.11,34.63) v1(63.11,30.82) v1(63.11,27.01) v1(63.11,23.2) v1(63.11,19.39) v1(63.28,15.59) v1(63.83,100.03) v1(64.29,124.74) v1(64.5,0.76) v1(65.11,12.24) v1(65.86,113.98) v1(66.44,124.54) v1(68.1,124.74) v1(68.31,0.76) v1(68.43,10.39) v1(68.7,117.48) v1(68.7,116.59) v1(69.8,114.87) v1(70.08,124.49) v1(70.05,117.53) v1(70.05,116.65) v1(71.35,122.66) v1(71.45,117.53) v1(71.45,116.65) v1(71.91,124.74) v1(72.12,0.76) v1(72.24,10.58) v1(72.72,121.29) v1(73.05,119.49) v1(73.23,103.18) v1(73.48,115.88) v1(73.48,114.36) v1(73.96,123.2) v1(74.9,120.23) v1(75.36,12.77) v1(75.72,124.74) v1(75.83,100.76) v1(75.93,0.76) v1(76.25,122.61) v1(76.78,115.38) v1(76.89,97.1) v1(76.89,93.29) v1(76.89,89.48) v1(76.89,85.67) v1(76.89,81.86) v1(76.89,78.05) v1(76.89,74.24) v1(76.89,70.43) v1(76.89,66.62) v1(76.89,62.81) v1(76.89,59) v1(76.89,55.19) v1(76.89,51.38) v1(76.89,47.57) v1(76.89,43.76) v1(76.89,39.95) v1(76.89,36.14) v1(76.89,32.33) v1(76.89,28.52) v1(76.89,24.71) v1(76.89,20.9) v1(76.89,17.09) v1(76.91,114.36) v1(77.39,120.91) v1(78.23,119.52) v1(78.46,122.92) v1(78.53,114.23) v1(79.53,124.74) v1(79.74,0.76) v1(79.91,119.95) v1(80.08,82.61) v1(80.29,121.65) v1(80.59,64.19) v1(80.67,75.22) v1(80.69,70.82) v1(80.74,102.17) v1(81.1,122.66) v1(81.13,119.19) v1(81.38,14.21) v1(81.66,124.67) v1(82.12,120.54) v1(82.1,5.63) v1(82.37,90.25) v1(82.77,43.49) v1(83.3,124.16) v1(83.36,97.16) v1(83.34,2.02) v1(83.54,42.99) v1(83.54,41.84) v1(83.76,117.1) v1(84.1,18.12) v1(84.4,109.28) v1(84.4,107.88) v1(84.4,106.99) v1(84.4,101.89) v1(84.5,24.16) v1(84.47,8.62) v1(84.81,37.4) v1(84.81,36.38) v1(84.81,35.24) v1(85.39,24.16) v1(86,66.76) v1(85.95,63.05) v1(86.05,76.82) v1(86.28,24.16) v1(86.31,87.69) v1(86.38,58.2) v1(86.43,60.08) v1(87.02,102.88) v1(87.57,117.19) v1(87.6,43.49) v1(87.7,60.08) v1(87.65,58.2) v1(88,124.36) v1(87.98,101.35) v1(87.98,24.19) v1(88.08,98.1) v1(88.16,7.7) v1(88.36,42.99) v1(88.36,41.84) v1(88.54,99.68) v1(88.64,117.76) v1(88.67,83.14) v1(88.87,24.19) v1(88.84,3.95) v1(88.97,60.08) v1(88.92,58.2) v1(89.06,120.7) v1(89.18,70.85) v1(89.33,65.97) v1(89.48,75.88) v1(89.41,74.71) v1(89.76,24.19) v1(90.35,18.63) v1(90.93,103.21) v1(90.93,0.76) v1(91.49,70.01) v1(91.56,23.88) v1(91.79,124.74) v1(92.66,29.9) v1(93.01,27.97) v1(93.38,51.2) v1(93.43,53.08) v1(93.6,115.65) v1(93.65,116.87) v1(93.62,32.29) v1(93.75,114.11) v1(93.72,47.84) v1(94.03,118.3) v1(94.36,55.51) v1(94.64,81.36) v1(94.7,53.08) v1(94.65,51.2) v1(94.74,0.76) v1(94.87,25.08) v1(94.82,14.41) v1(94.92,98.03) v1(94.97,92.9) v1(94.99,20.96) v1(95.04,43.11) v1(95.2,86.34) v1(95.2,83.47) v1(95.17,79.21) v1(95.25,58.68) v1(95.6,124.74) v1(95.86,118.63) v1(95.97,53.08) v1(95.92,51.2) v1(96.24,80.65) v1(96.21,61.4) v1(96.52,98.03) v1(96.56,92.59) v1(96.52,87.03) v1(97.23,6.41) v1(98.11,95.59) v1(98.11,91.78) v1(98.12,89.59) v1(98.11,87.97) v1(98.11,84.16) v1(98.11,80.35) v1(98.11,76.54) v1(98.11,72.73) v1(98.11,68.92) v1(98.11,65.11) v1(98.11,61.3) v1(98.11,57.49) v1(98.11,53.68) v1(98.11,49.87) v1(98.11,46.06) v1(98.11,42.25) v1(98.11,38.44) v1(98.11,34.63) v1(98.11,30.82) v1(98.11,27.01) v1(98.11,23.2) v1(98.11,19.39) v1(98.28,15.59) v1(98.55,0.76) v1(100.11,12.24) v1(101.8,117.53) v1(101.8,116.26) v1(101.8,114.99) v1(101.8,113.72) v1(101.8,112.45) v1(102.36,0.76) v1(103.07,117.53) v1(103.07,116.26) v1(103.07,114.99) v1(103.07,113.72) v1(103.07,112.45) v1(103.43,10.39) v1(104.34,117.53) v1(104.34,116.26) v1(104.34,114.99) v1(104.34,113.72) v1(104.34,112.45) v1(105.61,117.53) v1(105.61,116.26) v1(105.61,114.99) v1(105.61,113.72) v1(105.61,112.45) v1(106.12,124.77) v1(106.17,0.76) v1(106.88,117.53) v1(106.88,116.26) v1(106.88,114.99) v1(106.88,113.72) v1(106.88,112.45) v1(107.24,10.58) v1(109.98,0.76) v1(110.36,12.77) v1(111.83,124.77) v1(111.89,97.1) v1(111.89,93.29) v1(111.89,89.48) v1(111.89,85.67) v1(111.89,81.86) v1(111.89,78.05) v1(111.89,74.24) v1(111.89,70.43) v1(111.89,66.62) v1(111.89,62.81) v1(111.89,59) v1(111.89,55.19) v1(111.89,51.38) v1(111.89,47.57) v1(111.89,43.76) v1(111.89,39.95) v1(111.89,36.14) v1(111.89,32.33) v1(111.89,28.52) v1(111.89,24.71) v1(111.89,20.9) v1(111.89,17.09) v1(112.09,33.59) v1(112.72,110.9) v1(113.79,0.76) v1(113.89,92.59) v1(114.55,20.89) v1(114.65,124.74) v1(114.73,26.88) v1(114.73,24.39) v1(114.75,3.11) v1(114.83,29.62) v1(114.98,70.24) v1(115.14,113.62) v1(115.69,115.1) v1(115.85,65.11) v1(116.08,107.53) v1(116.28,116.7) v1(117.09,120.19) v1(117.17,4.55) v1(117.5,106.15) v1(117.45,68.97) v1(117.6,0.77) v1(117.7,115.38) v1(117.75,62.95) v1(117.77,43.49) v1(117.85,93.63) v1(118.34,123.79) v1(118.54,42.99) v1(118.54,41.84) v1(118.51,8.12) v1(118.72,110.17) v1(118.9,32.49) v1(118.95,28.51) v1(119.06,116.94) v1(119.35,24.44) v1(119.68,108.11) v1(119.93,37.4) v1(119.93,36.38) v1(119.93,35.24) v1(120.7,109.53) v1(121.18,106.76) v1(121.1,24.32) v1(121.38,58.2) v1(121.43,60.08) v1(121.56,66.56) v1(121.99,24.32) v1(122.22,110.88) v1(122.25,108.09) v1(122.31,8.36) v1(122.6,43.49) v1(122.7,60.08) v1(122.65,58.2) v1(122.85,117.4) v1(122.88,24.32) v1(122.89,1.38) v1(122.98,124.16) v1(123.36,42.99) v1(123.36,41.84) v1(123.75,109.53) v1(123.8,63.66) v1(123.98,121.03) v1(123.97,60.08) v1(123.92,58.2) v1(124.1,4.99) v1(124.87,124.74) v1(124.86,110.9) v1(124.99,115.78) v1(125.04,24.32) v1(125.12,10.22) v1(125.27,21.12) v1(125.32,118.83) v1(125.93,24.32) v1(126.67,124.62) v1(126.65,0.76) v1(126.82,30.92) v1(126.82,24.32) v1(126.87,2.65) v1(127.18,15.83) v1(128.38,51.2) v1(128.43,53.08) v1(128.57,7.45) v1(128.68,124.66) v1(129.7,53.08) v1(129.65,51.2) v1(130.02,11.54) v1(130.19,121.17) v1(130.15,44.99) v1(130.38,82.05) v1(130.38,30.44) v1(130.43,96.73) v1(130.46,0.8) v1(130.53,88.12) v1(130.63,37.63) v1(130.67,4.61) v1(130.97,53.08) v1(130.92,51.2) v1(131.34,16.16) v1(132.13,65.29) v1(132.13,60.38) v1(132.13,22.74) v1(132.28,19.59) v1(132.38,7.93) v1(132.53,114.64) v1(132.56,86.7) v1(132.56,75.62) v1(132.61,71.1) v1(132.87,94.06) v1(132.89,92.16) v1(132.92,110.57) v1(132.92,84.08) v1(132.94,80.09) v1(133.04,121.19) v1(134.3,5.76) v1(134.41,110.42) v1(134.56,89.57) v1(134.56,85.76) v1(134.56,81.95) v1(134.56,78.14) v1(134.56,74.33) v1(134.56,70.52) v1(134.56,66.71) v1(134.56,62.9) v1(134.56,59.09) v1(134.56,55.28) v1(134.56,51.47) v1(134.56,47.66) v1(134.56,43.85) v1(134.56,40.04) v1(134.56,36.23) v1(134.56,32.42) v1(134.56,28.61) v1(134.56,24.8) v1(134.56,20.99) v1(134.56,17.18) v1(134.56,13.37) v1(134.56,9.56) v1(134.87,92.03) v1(136.55,121.14) v1(136.65,92.76) v1(137.81,121.14) v1(138.07,92.79) v1(139.57,96.12) v1(139.6,93.28) v1(139.67,97.44) v1(139.74,106.42) v1(139.8,104.94) v1(139.77,103.64) v1(139.74,102.61) v1(139.77,100.97) v1(139.74,98.8) v1(139.74,94.99) v1(139.82,119.26) v2(26.46,106.79) v2(27.23,106.79) v2(29.64,108.31) v2(30.4,108.31) v2(49.07,107.98) v2(53.03,106.08) v2(55.83,102.98) v2(56.11,110.77) v2(60.3,110.77) v2(60.25,105.27) v2(61.01,105.27) v2(61.39,103.16) v2(61.64,106.28) v2(62.41,106.28) v2(62.66,110.77) v2(63.5,103.16) v2(63.88,105.82) v2(67.18,105.44) v2(69.49,105.55) v2(71.42,110.77) v2(73.58,105.55) v2(76.02,105.9) v2(77.9,124.62) v2(79.45,109.03) v2(81.76,111.39) v2(82.37,113.72) v2(85.65,116.75) v2(87.27,112.81) v2(88.49,106.92) v2(93.37,112.84) v2(94.49,124.85) v2(94.43,109.53) v2(94.56,111.18) v2(95.96,111.82) v2(95.93,103.09) v2(96.47,102.34) v2(96.64,124.9) v2(96.64,100.9) v2(96.97,109.41) v2(97.61,111.69) v2(97.86,124.9) v2(98.12,109.41) v2(98.5,98.61) v2(98.63,110.8) v2(98.96,124.9) v2(99.01,101.38) v2(99.85,102.42) v2(100.28,124.9) v2(101.65,124.9) v2(103.25,124.9) v2(104.59,124.9) v2(108.66,109.61) v2(109.32,119.46) v2(109.7,108.39) v2(109.9,120.76) v2(109.88,102.47) v2(110.64,104.05) v2(111.1,109.96) v2(111.05,101.43) v2(111.99,117.94) v2(112.21,99.25) v2(112.49,109.84) v2(112.77,113.98) v2(113.18,116.49) v2(113.79,108.67) v2(113.89,97.62) v2(113.99,90) v2(114.09,93.91) v2(114.63,122.11) v2(114.83,112.23) v2(114.91,120) v2(115.8,118.8) v2(116.08,122.82) v2(117.98,116.31) v2(117.9,112.84) v2(118.44,103.31) v2(118.44,101.79) v2(118.44,100.26) v2(118.56,98.74) v2(118.56,97.21) v2(118.56,95.06) v2(119.25,115.78) v2(119.71,111.03) v2(120.6,112.33) v2(120.57,94.57) v2(121,104.33) v2(121.23,114.36) v2(121.36,96.45) v2(121.49,102.83) v2(121.41,101.05) v2(121.41,98.92) v2(121.41,97.32) v2(122.1,115.4) v2(122.88,112.33) v2(122.91,123) v2(123.06,98.61) v2(123.29,106.74) v2(124.58,108.03) v2(124.58,100.19) v2(125.17,112.33) v2(126.11,122.41) v2(126.13,101.28) v2(126.57,109.61) v2(127,118.42) v2(127,116.72) v2(127,115.02) v2(127.07,108.29) v2(127.18,112.4) v2(127.73,120.38) v2(128.19,118.93) v2(128.85,122.64) v2(128.98,112.25) v2(129.11,105.09) v2(129.59,110.02) v2(129.51,107.42) v2(129.74,119.08) v2(130.2,98.2) v2(130.15,94.06) v2(130.27,115.45) v2(130.58,117.69) v2(130.55,90.91) v2(131.01,103.23) v2(131.32,101.1) v2(131.44,121.29) v2(131.62,119.36) v2(131.98,95.64) v2(132.15,117.41) v2(132.18,101.96) v2(133.12,97.52) v2(133.27,113.83) v2(133.42,115.91) v2(133.78,120.76) v2(133.88,103.23) v2(133.91,119.36) v2(134.11,102.17) v2(134.26,120.02) v2(134.62,116.8) v2(136.07,120.76) v2(137.31,117.25) v2(137.89,111.46) v2(138.76,120.12) v2(139.72,121.17) v2(139.9,111.34) v2(139.89,110.09) v2(139.9,108.87) v2(139.82,107.58)
